# EAGLE board eightbyeight-teardrop (EAGLE 7.7.0), part 1 of 3
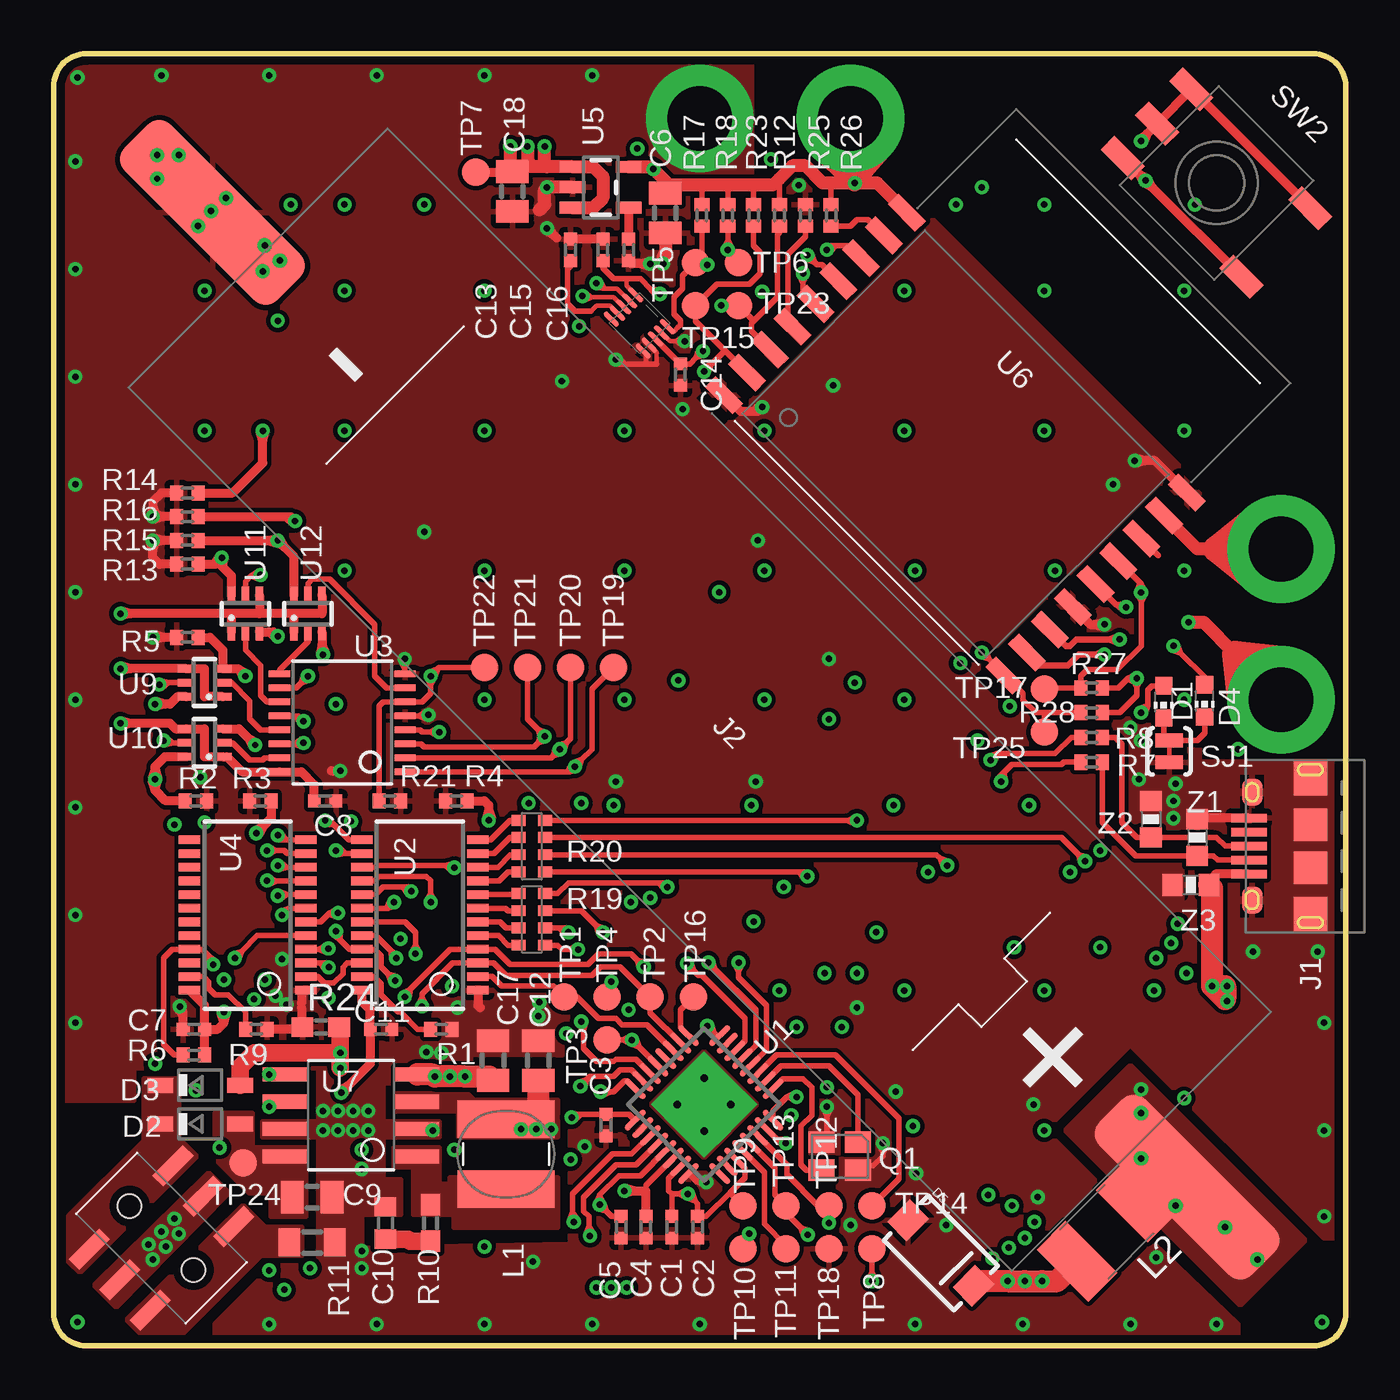
[diagram p0: board, top side]
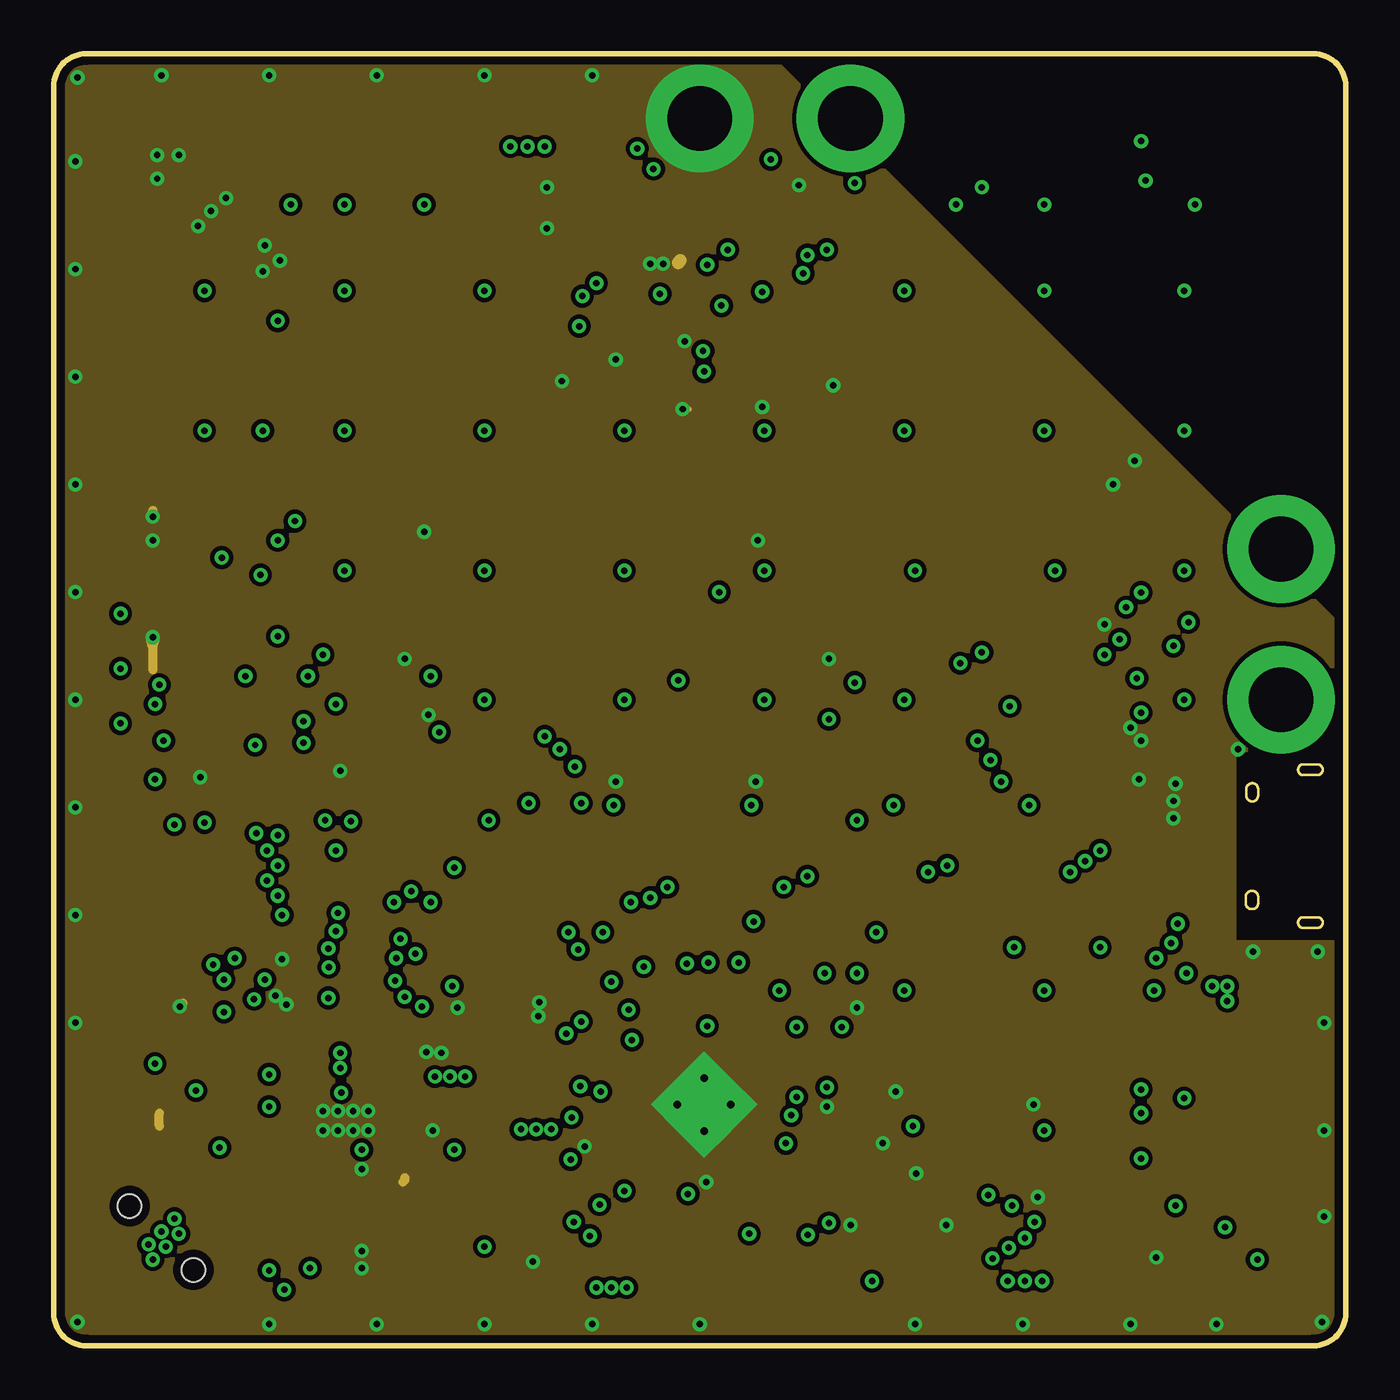
[diagram p1: board, inner layer GND]
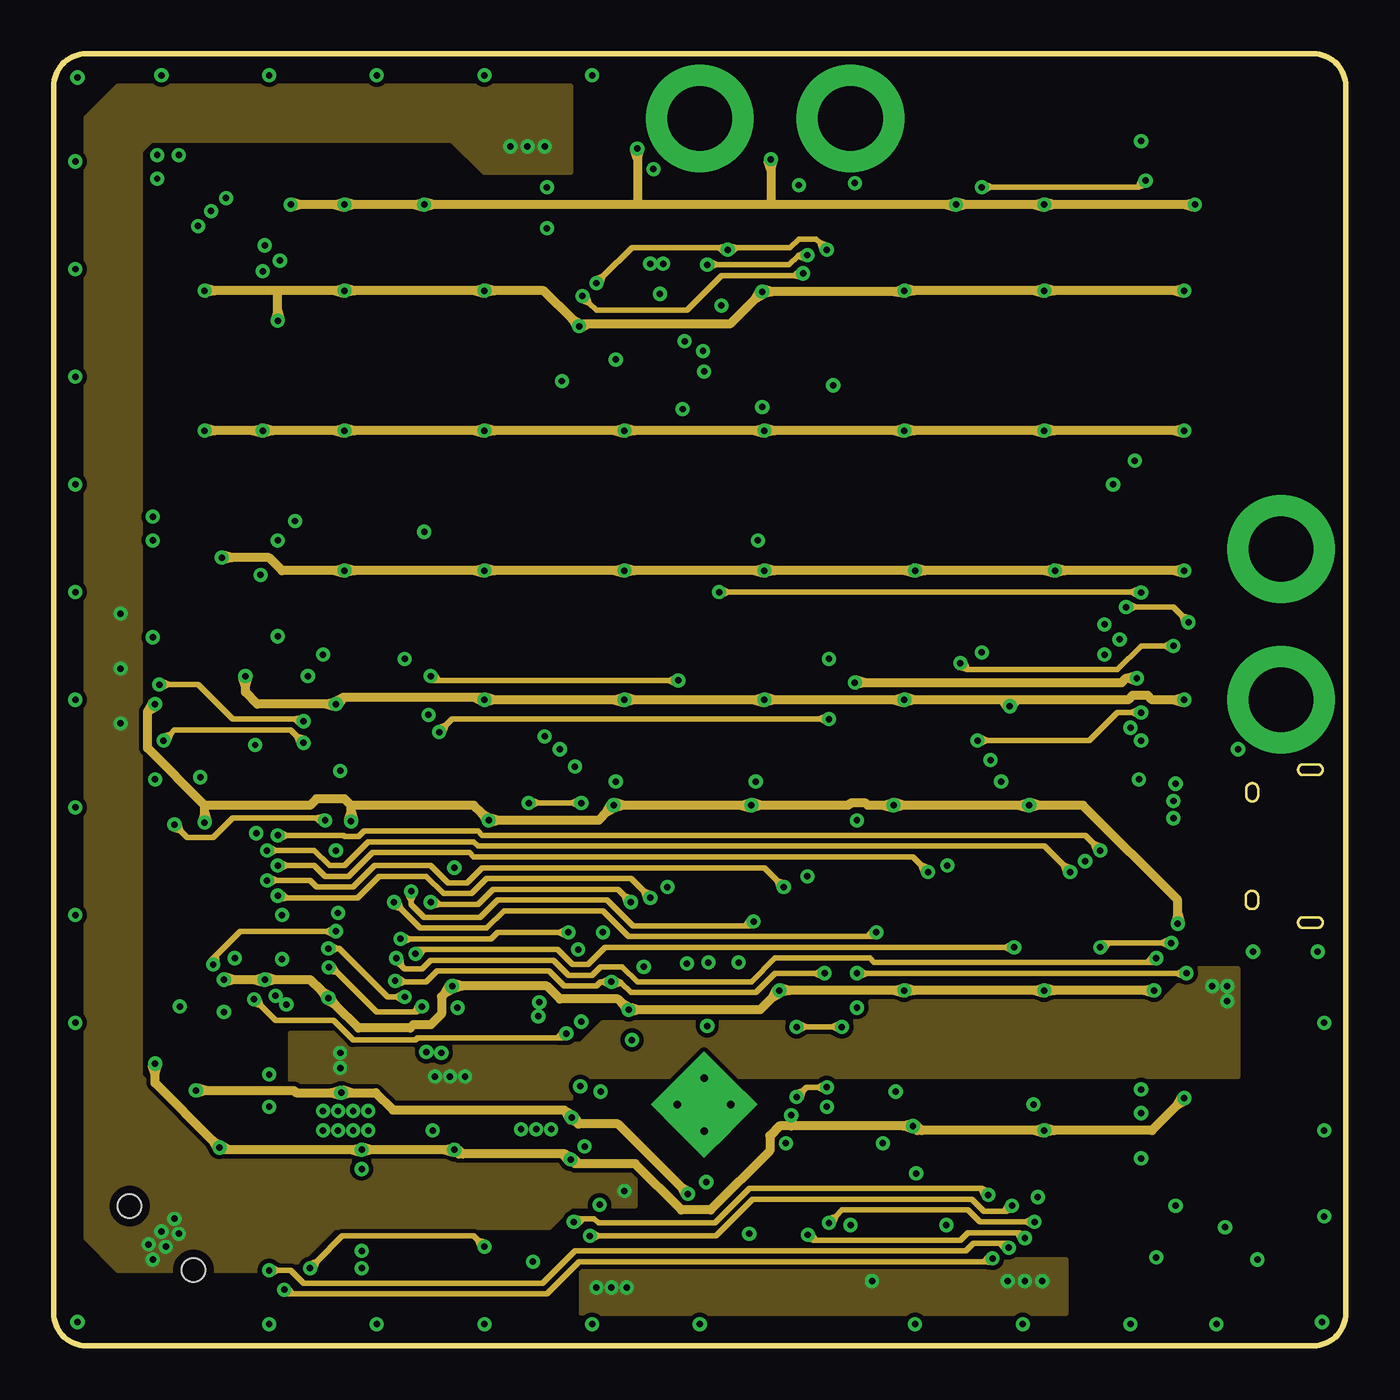
[diagram p2: board, inner layer Route]
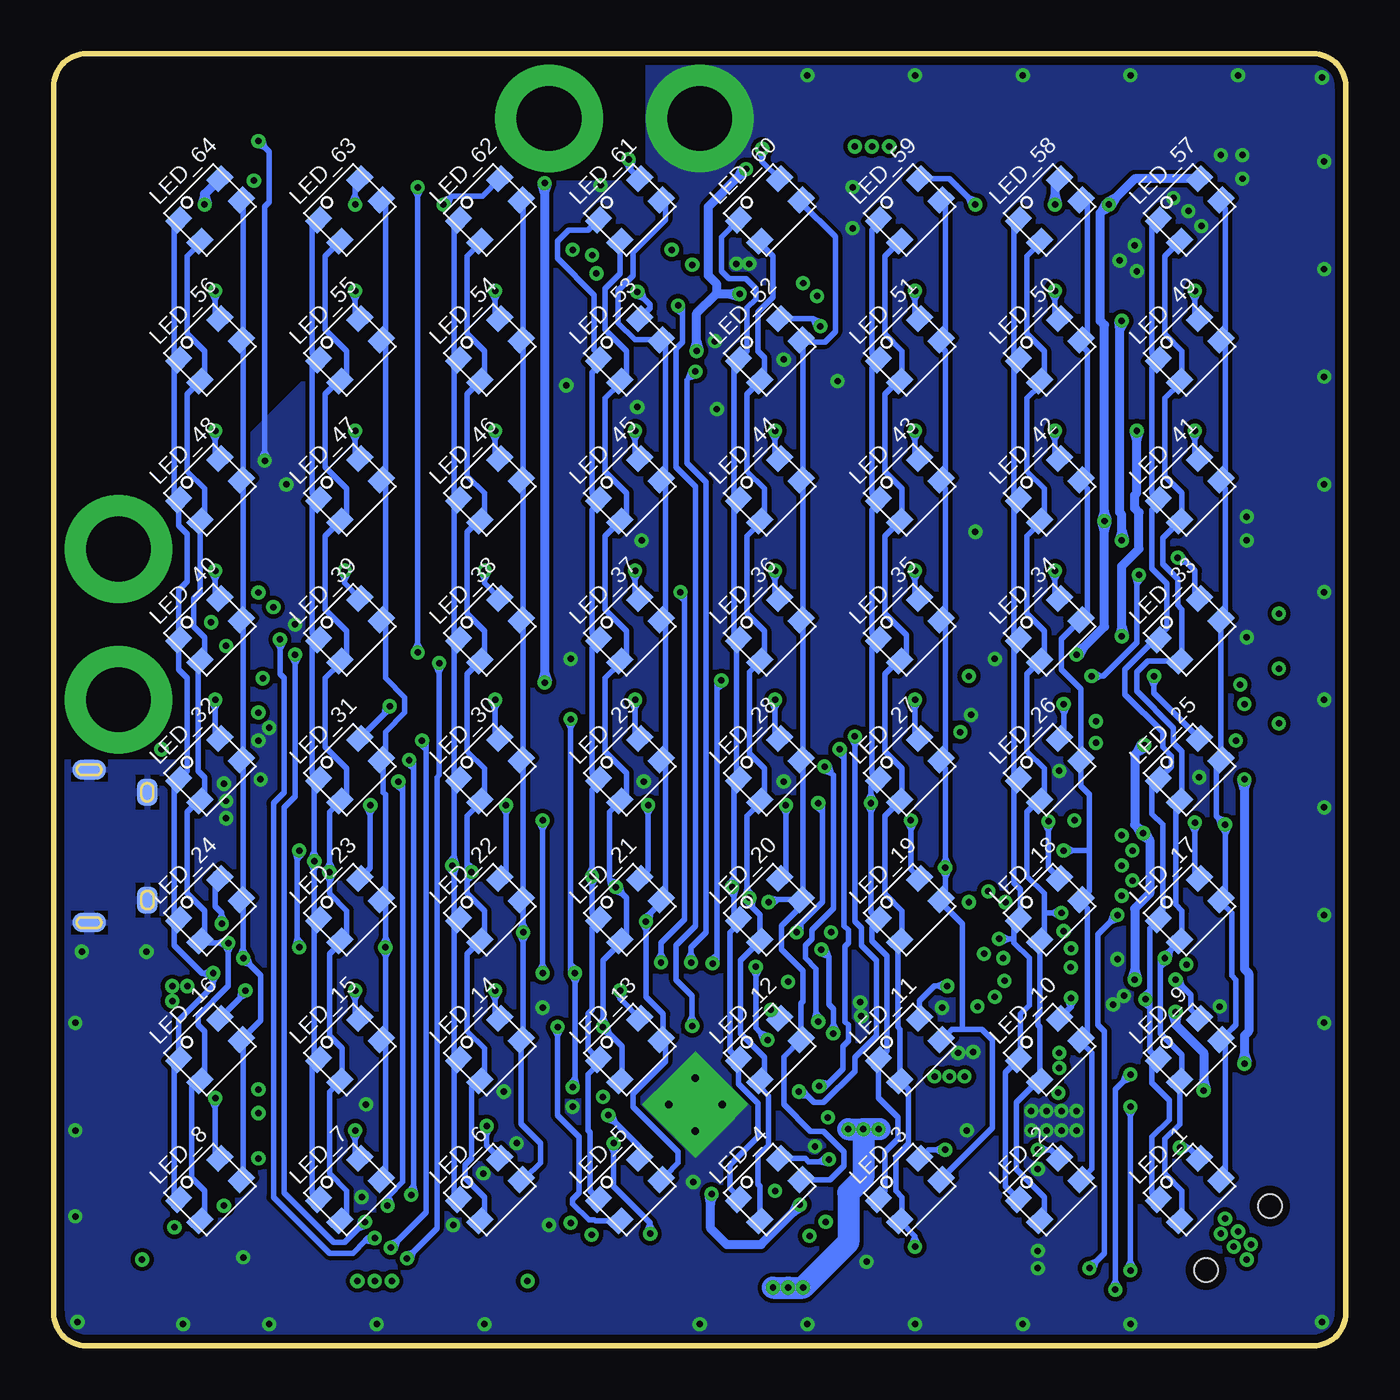
[diagram p3: board, bottom side, seen from below]

Size 60 x 60 mm. Coordinates in mm from the lower left corner, seen from the top.
Outline: 0,58.5 0,1.5 arc90 1.5,0 58.5,0 arc90 60,1.5 60,58.5 arc90 58.5,60 1.5,60 arc90 0,58.5
Copper layers (1*2+15*16): Top 0.0356mm / dielectric 0.6mm / GND 0.0356mm / dielectric 0.2mm / Route 0.0356mm / dielectric 0.6mm / Bottom 0.0356mm
Design rules "BlinkyTape *": minimum track width 0.25mm, minimum drill 0.3mm, track to track 0.2mm, track to pad 0.2mm, pad to pad 0.2mm, via to via 0.2mm, smd to smd 0.2mm, copper to edge 15mil, drill to drill 0.25mm, minimum pad ring 7mil, minimum via ring 7mil, stop-mask expansion 2mil, vias tented up to drill 0.35mm, thermal gap 10mil
Net classes: 1 power: width 0.254 mm, drill 0.35 mm
tRestrict: area 55.1,25.9 to 55.5,26.5; area 55.8,25.9 to 56.2,26.5; area 55.8,24.9 to 56.2,25.5; area 55.1,24.9 to 55.5,25.5; area 55.1,20.9 to 55.5,21.5; area 55.8,20.9 to 56.2,21.5; area 55.8,19.9 to 56.2,20.5; area 55.1,19.9 to 55.5,20.5; area 47.2,3.6 to 50.6,7; area 19.5,13.1 to 23.3,13.4; 13 lines
bRestrict: area 55.8,25.9 to 56.2,26.5; area 55.1,25.9 to 55.5,26.5; area 55.1,24.9 to 55.5,25.5; area 55.8,24.9 to 56.2,25.5; area 55.8,20.9 to 56.2,21.5; area 55.1,20.9 to 55.5,21.5; area 55.1,19.9 to 55.5,20.5; area 55.8,19.9 to 56.2,20.5; area 57.5,19.8 to 58.1,20.2; area 58.6,19.8 to 59.2,20.2; area 58.6,19.1 to 59.2,19.5; area 57.5,19.1 to 58.1,19.5; 4 more areas

## Footprints (pad centres in the part's own frame; a part is rotated, then mirrored left to right if it is on the bottom)
CAP_0402 = smd 0.6 x 0.6: 1 -0.5,0; 2 0.5,0
CAP_0805 = smd 1.05 x 1.5: 1 -0.925,0; 2 0.925,0
CAP_0603 = smd 0.9 x 1: 1 -0.75,0; 2 0.75,0
CHIP-LED0603 = smd 0.8 x 0.8: A 0,-0.75; C 0,0.75
SOD-123 = smd 1.2 x 0.7: A 1.85,0; C -1.85,0
SMA-DIODE = smd 1.27 x 1.47: A -2.15,0; C 2.15,0
USB_MICRO_THRUHOLE = smd 1.645 x 1.55: PAD$1 -3.172,0; PAD$4 3.172,0 | smd 1.5 x 1.55: PAD$2 -1,0; PAD$3 1,0 | smd 1.25 x 0.95: PAD$5 -2.5,2.7; PAD$6 2.5,2.7 | smd 0.9 x 1.55 bottom: PAD$7 -3.55,0; PAD$8 3.55,0 | smd 1.25 x 0.95 bottom: PAD$9 -2.5,2.7; PAD$10 2.5,2.7 | smd 0.4 x 1.65: PIN$1 -1.3,2.85; PIN$2 -0.65,2.85; PIN$3 0,2.85; PIN$4 0.65,2.85; PIN$5 1.3,2.85
BATTERY_AA_SMD = smd 10 x 3: + 32,0; - -32,0
INDUCTOR_CD43 = smd 1.75 x 4.5: P$1 -1.625,0; P$2 1.625,0
L1812 = smd 1.9 x 3.4: 1 -1.95,0; 2 1.95,0
LED_3528 = smd 1 x 0.8: 1 -1.35,0.7; 2 1.35,0.7; 3 1.36,-0.7; 4 -1.35,-0.7
CRSYTAL_2520 = smd 1.2 x 1: P$1 -0.85,-0.65; P$2 0.85,-0.65; P$3 0.85,0.65; P$4 -0.85,0.65
R_0402 = smd 0.6 x 0.7: 1 -0.5,0; 2 0.5,0
R_0603 = smd 1 x 0.9: 1 -0.85,0; 2 0.85,0
R_0805 = smd 1 x 1.3: 1 -1.05,0; 2 1.05,0
0603-ARV = smd 0.5 x 0.65: 1 -1.2,-0.625; 2 -0.4,-0.625; 3 0.4,-0.625; 4 1.2,-0.625; 5 1.2,0.625; 6 0.4,0.625; 7 -0.4,0.625; 8 -1.2,0.625
SJ_2S-TRACE = smd 0.635 x 1.27: 1 -0.508,0; 2 0.508,0
SWITCH_6P-2POS = smd 0.7 x 2: O0 -2,2.75; O1 -2,-2.75; P0 0,2.75; P1 0,-2.75; S0 2,2.75; S1 2,-2.75 | hole 1.1: -2.1,0; 2.1,0
TD-07XB = smd 2 x 0.9: 1 -3.9,-2.25; 2 3.9,-2.25; 3 -3.9,2.25; 4 3.9,2.25; 5 -3.9,0
B1,27 = smd 1.27 x 1.27: TP 0,0
QFN32_5X5_LONGLEADS = smd 1.25 x 0.275: 1 -2.775,1.75; 2 -2.775,1.25; 3 -2.775,0.75; 4 -2.775,0.25; 5 -2.775,-0.25; 6 -2.775,-0.75; 7 -2.775,-1.25; 8 -2.775,-1.75; 17 2.775,-1.75; 18 2.775,-1.25; 19 2.775,-0.75; 20 2.775,-0.25; 21 2.775,0.25; 22 2.775,0.75; 23 2.775,1.25; 24 2.775,1.75 | smd 0.275 x 1.25: 9 -1.75,-2.775; 10 -1.25,-2.775; 11 -0.75,-2.775; 12 -0.25,-2.775; 13 0.25,-2.775; 14 0.75,-2.775; 15 1.25,-2.775; 16 1.75,-2.775; 25 1.75,2.775; 26 1.25,2.775; 27 0.75,2.775; 28 0.25,2.775; 29 -0.25,2.775; 30 -0.75,2.775; 31 -1.25,2.775; 32 -1.75,2.775 | drill 0.35 pad 1.75 square: PAD@1 -0.875,0.875; PAD@4 0.875,0.875; PAD@11 0.875,-0.875 | drill 0.35 pad 1.76 square: PAD@9 -0.875,-0.875
SSOP24-150 = smd 1 x 0.4: 1 -2.7,3.493; 2 -2.7,2.857; 3 -2.7,2.223; 4 -2.7,1.587; 5 -2.7,0.953; 6 -2.7,0.318; 7 -2.7,-0.318; 8 -2.7,-0.953; 9 -2.7,-1.587; 10 -2.7,-2.223; 11 -2.7,-2.857; 12 -2.7,-3.493; 13 2.7,-3.493; 14 2.7,-2.857; 15 2.7,-2.223; 16 2.7,-1.587; 17 2.7,-0.953; 18 2.7,-0.318; 19 2.7,0.318; 20 2.7,0.953; 21 2.7,1.587; 22 2.7,2.223; 23 2.7,2.857; 24 2.7,3.493
TSSOP16 = smd 0.305 x 0.991: 1 -1.95,-2.918; 2 -1.3,-2.918; 3 -0.65,-2.918; 4 0,-2.918; 5 0.65,-2.918; 6 1.3,-2.918; 7 1.95,-2.918; 8 2.6,-2.918; 9 2.6,2.918; 10 1.95,2.918; 11 1.3,2.918; 12 0.65,2.918; 13 0,2.918; 14 -0.65,2.918; 15 -1.3,2.918; 16 -1.95,2.918
SOT23-5 = smd 0.55 x 1.2: 1 -0.95,-1.3; 2 0,-1.3; 3 0.95,-1.3; 4 0.95,1.3; 5 -0.95,1.3
ESP_WROOM_02 = smd 1.8 x 0.7: 3V3 -9.2,3; EN -9.2,1.5; GND$1 -9.2,-9; GND$2 9.2,3; GND$3 9.2,-4.5; IO0 -9.2,-7.5; IO2 -9.2,-6; IO4 9.2,-9; IO5 9.2,-3; IO12 -9.2,-1.5; IO13 -9.2,-3; IO14 -9.2,0; IO15 -9.2,-4.5; IO18 9.2,1.5; RST 9.2,-1.5; RXD 9.2,-7.5; TOUT 9.2,0; TXD 9.2,-6
SO08-150 = smd 0.66 x 2.032: 1 -1.905,-3.073; 2 -0.635,-3.073; 3 0.635,-3.073; 4 1.905,-3.073; 5 1.905,3.073; 6 0.635,3.073; 7 -0.635,3.073; 8 -1.905,3.073
VFDFN-10 = smd 0.9 x 0.225: P$1 -1.05,0.8; P$2 -1.05,0.4; P$3 -1.05,0; P$4 -1.05,-0.4; P$5 -1.05,-0.8; P$6 1.05,-0.8; P$7 1.05,-0.4; P$8 1.05,0; P$9 1.05,0.4; P$10 1.05,0.8
SC70-6L = smd 0.35 x 0.8: 1 -0.65,-0.85; 2 0,-0.85; 3 0.65,-0.85; 4 0.65,0.85; 5 0,0.85; 6 -0.65,0.85
IO_HOLE_3MM = drill 3 pad 5: 1 0,0
SPARKFUN-RESISTORS_0603-RES = smd 0.94 x 1.016: 1 -0.85,0; 2 0.85,0

## Placement (x,y rotation side)
C1  100nF  [CAP_0402]  28.7,5.5 270 top
C2  100nF  [CAP_0402]  29.9,5.5 270 top
C3  100nF  [CAP_0402]  25.65,10.25 270 top
C4  100nF  [CAP_0402]  27.5,5.5 270 top
C5  2.2uF  [CAP_0402]  26.35,5.5 270 top
C6  10uF  [CAP_0805]  28.4,52.6 270 top
C7  100nF  [CAP_0402]  6.5,14.7 180 top
C8  100nF  [CAP_0402]  12.6,25.3 0 top
C9  10uF  [CAP_0805]  12,6.9 0 top
C10  2.2nF  [CAP_0603]  15.4,5.7 90 top
C11  100nF  [CAP_0402]  15.2,14.7 0 top
C12  10uF  [CAP_0805]  22.5,13.25 90 top
C13  100nF  [CAP_0402]  24,50.9 90 top
C14  100nF  [CAP_0402]  29.1,45.1 270 top
C15  100nF  [CAP_0402]  25.5,50.9 90 top
C16  47pF  [CAP_0402]  26.7,50.9 270 top
C17  10uF  [CAP_0805]  20.4,13.25 90 top
C18  10uF  [CAP_0805]  21.3,53.6 270 top
D1  ORANGE  [CHIP-LED0603]  51.55,29.9 180 top
D2  1N5819  [SOD-123]  6.8,10.3 0 top
D3  1N5819  [SOD-123]  6.8,12.1 0 top
D4  PURPLE  [CHIP-LED0603]  53.45,29.95 180 top
D5  1N5822  [SMA-DIODE]  41.2,4.3 315 top
J1  USB_MICROSMT+THRUHULE  [USB_MICRO_THRUHOLE]  58.36,23.2 90 top
J2  BATTERYAA_SMD  [BATTERY_AA_SMD]  30,30 315 top
L1  2.2uH  [INDUCTOR_CD43]  21,8.9 270 top
L2  1812L260THDR  [L1812]  48.9,5.3 225 top
LED_1  LED_RGB_CA3528  [LED_3528]  7.25,7.25 45 bottom
LED_2  LED_RGB_CA3528  [LED_3528]  13.75,7.25 45 bottom
LED_3  LED_RGB_CA3528  [LED_3528]  20.25,7.25 45 bottom
LED_4  LED_RGB_CA3528  [LED_3528]  26.75,7.25 45 bottom
LED_5  LED_RGB_CA3528  [LED_3528]  33.25,7.25 45 bottom
LED_6  LED_RGB_CA3528  [LED_3528]  39.75,7.25 45 bottom
LED_7  LED_RGB_CA3528  [LED_3528]  46.25,7.25 45 bottom
LED_8  LED_RGB_CA3528  [LED_3528]  52.75,7.25 45 bottom
LED_9  LED_RGB_CA3528  [LED_3528]  7.25,13.75 45 bottom
LED_10  LED_RGB_CA3528  [LED_3528]  13.75,13.75 45 bottom
LED_11  LED_RGB_CA3528  [LED_3528]  20.25,13.75 45 bottom
LED_12  LED_RGB_CA3528  [LED_3528]  26.75,13.75 45 bottom
LED_13  LED_RGB_CA3528  [LED_3528]  33.25,13.75 45 bottom
LED_14  LED_RGB_CA3528  [LED_3528]  39.75,13.75 45 bottom
LED_15  LED_RGB_CA3528  [LED_3528]  46.25,13.75 45 bottom
LED_16  LED_RGB_CA3528  [LED_3528]  52.75,13.75 45 bottom
LED_17  LED_RGB_CA3528  [LED_3528]  7.25,20.25 45 bottom
LED_18  LED_RGB_CA3528  [LED_3528]  13.75,20.25 45 bottom
LED_19  LED_RGB_CA3528  [LED_3528]  20.25,20.25 45 bottom
LED_20  LED_RGB_CA3528  [LED_3528]  26.75,20.25 45 bottom
LED_21  LED_RGB_CA3528  [LED_3528]  33.25,20.25 45 bottom
LED_22  LED_RGB_CA3528  [LED_3528]  39.75,20.25 45 bottom
LED_23  LED_RGB_CA3528  [LED_3528]  46.25,20.25 45 bottom
LED_24  LED_RGB_CA3528  [LED_3528]  52.75,20.25 45 bottom
LED_25  LED_RGB_CA3528  [LED_3528]  7.25,26.75 45 bottom
LED_26  LED_RGB_CA3528  [LED_3528]  13.75,26.75 45 bottom
LED_27  LED_RGB_CA3528  [LED_3528]  20.25,26.75 45 bottom
LED_28  LED_RGB_CA3528  [LED_3528]  26.75,26.75 45 bottom
LED_29  LED_RGB_CA3528  [LED_3528]  33.25,26.75 45 bottom
LED_30  LED_RGB_CA3528  [LED_3528]  39.75,26.75 45 bottom
LED_31  LED_RGB_CA3528  [LED_3528]  46.25,26.75 45 bottom
LED_32  LED_RGB_CA3528  [LED_3528]  52.75,26.75 45 bottom
LED_33  LED_RGB_CA3528  [LED_3528]  7.25,33.25 45 bottom
LED_34  LED_RGB_CA3528  [LED_3528]  13.75,33.25 45 bottom
LED_35  LED_RGB_CA3528  [LED_3528]  20.25,33.25 45 bottom
LED_36  LED_RGB_CA3528  [LED_3528]  26.75,33.25 45 bottom
LED_37  LED_RGB_CA3528  [LED_3528]  33.25,33.25 45 bottom
LED_38  LED_RGB_CA3528  [LED_3528]  39.75,33.25 45 bottom
LED_39  LED_RGB_CA3528  [LED_3528]  46.25,33.25 45 bottom
LED_40  LED_RGB_CA3528  [LED_3528]  52.75,33.25 45 bottom
LED_41  LED_RGB_CA3528  [LED_3528]  7.25,39.75 45 bottom
LED_42  LED_RGB_CA3528  [LED_3528]  13.75,39.75 45 bottom
LED_43  LED_RGB_CA3528  [LED_3528]  20.25,39.75 45 bottom
LED_44  LED_RGB_CA3528  [LED_3528]  26.75,39.75 45 bottom
LED_45  LED_RGB_CA3528  [LED_3528]  33.25,39.75 45 bottom
LED_46  LED_RGB_CA3528  [LED_3528]  39.75,39.75 45 bottom
LED_47  LED_RGB_CA3528  [LED_3528]  46.25,39.75 45 bottom
LED_48  LED_RGB_CA3528  [LED_3528]  52.75,39.75 45 bottom
LED_49  LED_RGB_CA3528  [LED_3528]  7.25,46.25 45 bottom
LED_50  LED_RGB_CA3528  [LED_3528]  13.75,46.25 45 bottom
LED_51  LED_RGB_CA3528  [LED_3528]  20.25,46.25 45 bottom
LED_52  LED_RGB_CA3528  [LED_3528]  26.75,46.25 45 bottom
LED_53  LED_RGB_CA3528  [LED_3528]  33.25,46.25 45 bottom
LED_54  LED_RGB_CA3528  [LED_3528]  39.75,46.25 45 bottom
LED_55  LED_RGB_CA3528  [LED_3528]  46.25,46.25 45 bottom
LED_56  LED_RGB_CA3528  [LED_3528]  52.75,46.25 45 bottom
LED_57  LED_RGB_CA3528  [LED_3528]  7.25,52.75 45 bottom
LED_58  LED_RGB_CA3528  [LED_3528]  13.75,52.75 45 bottom
LED_59  LED_RGB_CA3528  [LED_3528]  20.25,52.75 45 bottom
LED_60  LED_RGB_CA3528  [LED_3528]  26.75,52.75 45 bottom
LED_61  LED_RGB_CA3528  [LED_3528]  33.25,52.75 45 bottom
LED_62  LED_RGB_CA3528  [LED_3528]  39.75,52.75 45 bottom
LED_63  LED_RGB_CA3528  [LED_3528]  46.25,52.75 45 bottom
LED_64  LED_RGB_CA3528  [LED_3528]  52.75,52.75 45 bottom
Q1  16MHz  [CRSYTAL_2520]  36.5,8.8 180 top
R1  1k 1%  [R_0402]  18,14.7 180 top
R2  4.7k  [R_0402]  6.6,25.3 180 top
R3  4.7k  [R_0402]  9.6,25.3 0 top
R4  4.7k  [R_0402]  18.7,25.3 0 top
R5  4.7k  [R_0402]  6.2,32.9 0 top
R6  10k  [R_0402]  6.5,13.5 0 top
R7  33  [R_0402]  48.2,27.1 180 top
R8  33  [R_0402]  48.2,28.25 180 top
R9  1k 1%  [R_0402]  9.4,14.7 180 top
R10  1  [R_0603]  17.5,5.7 270 top
R11  47  [R_0805]  12,4.8 180 top
R12  10k  [R_0402]  33.7,52.5 90 top
R13  4.7k  [R_0402]  6.2,36.3 0 top
R14  4.7k  [R_0402]  6.2,39.6 0 top
R15  4.7k  [R_0402]  6.2,37.4 0 top
R16  4.7k  [R_0402]  6.2,38.5 0 top
R17  4.7k  [R_0402]  30.1,52.5 90 top
R18  4.7k  [R_0402]  31.3,52.5 90 top
R19  200  [0603-ARV]  22.2,19.8 270 top
R20  200  [0603-ARV]  22.2,23.2 270 top
R21  10k  [R_0402]  15.6,25.3 180 top
R23  10k  [R_0402]  32.5,52.5 90 top
R24  510  [R_0603]  12.4,14.8 0 top
R25  10k  [R_0402]  34.9,52.5 270 top
R26  10k  [R_0402]  36.1,52.5 90 top
R27  10k  [R_0402]  48.2,30.55 0 top
R28  10k  [R_0402]  48.2,29.4 0 top
SJ1  SOLDERJUMPERTRACE  [SJ_2S-TRACE]  51.8,27.6 90 top
SW1  SWITCH_SPDT  [SWITCH_6P-2POS]  5,5 135 top
SW2  BRIGHTNESS  [TD-07XB]  54,54 315 top
TP1  PTR1B1,27  [B1,27]  23.7,16.2 0 top
TP2  PTR1B1,27  [B1,27]  27.7,16.2 0 top
TP3  PTR1B1,27  [B1,27]  25.7,14.2 0 top
TP4  PTR1B1,27  [B1,27]  25.7,16.2 0 top
TP5  PTR1B1,27  [B1,27]  29.8,50.3 0 top
TP6  PTR1B1,27  [B1,27]  31.8,50.3 0 top
TP7  PTR1B1,27  [B1,27]  19.6,54.5 0 top
TP8  PTR1B1,27  [B1,27]  38,4.5 0 top
TP9  PTR1B1,27  [B1,27]  32,6.5 0 top
TP10  PTR1B1,27  [B1,27]  32,4.5 0 top
TP11  PTR1B1,27  [B1,27]  34,4.5 0 top
TP12  PTR1B1,27  [B1,27]  36,6.5 0 top
TP13  PTR1B1,27  [B1,27]  34,6.5 0 top
TP14  PTR1B1,27  [B1,27]  38,6.5 0 top
TP15  PTR1B1,27  [B1,27]  29.8,48.3 0 top
TP16  PTR1B1,27  [B1,27]  29.7,16.2 0 top
TP17  PTR1B1,27  [B1,27]  46,30.5 0 top
TP18  PTR1B1,27  [B1,27]  36,4.5 0 top
TP19  PTR1B1,27  [B1,27]  26,31.5 0 top
TP20  PTR1B1,27  [B1,27]  24,31.5 0 top
TP21  PTR1B1,27  [B1,27]  22,31.5 0 top
TP22  PTR1B1,27  [B1,27]  20,31.5 0 top
TP23  PTR1B1,27  [B1,27]  31.8,48.3 0 top
TP24  PTR1B1,27  [B1,27]  8.8,8.5 0 top
TP25  PTR1B1,27  [B1,27]  46,28.5 0 top
U1  MK20DN64VFM5  [QFN32_5X5_LONGLEADS]  30.2,11.2 45 top
U2  ICN2026  [SSOP24-150]  17,20 180 top
U3  74138  [TSSOP16]  13.4,28.6 90 top
U4  ICN2026  [SSOP24-150]  9,20 180 top
U5  MIC5219 3.3V  [SOT23-5]  25.4,53.8 270 top
U6  ESP_WROOM_02  [ESP_WROOM_02]  44,44 315 top
U7  MP3401A  [SO08-150]  13.8,10.7 90 top
U8  MMA8653FC  [VFDFN-10]  27.2,47.5 315 top
U9  FDG6316P  [SC70-6L]  7,30.8 90 top
U10  FDG6316P  [SC70-6L]  7,28 90 top
U11  FDG6316P  [SC70-6L]  8.9,34 0 top
U12  FDG6316P  [SC70-6L]  11.8,34 0 top
U$2  TEST_POINT  [IO_HOLE_3MM]  30,57 0 top
U$6  TEST_POINT  [IO_HOLE_3MM]  57,30 0 top
U$9  TEST_POINT  [IO_HOLE_3MM]  57,37 0 top
U$10  TEST_POINT  [IO_HOLE_3MM]  37,57 0 top
Z1  PGB1010603  [SPARKFUN-RESISTORS_0603-RES]  53.1,23.6 270 top
Z2  PGB1010603  [SPARKFUN-RESISTORS_0603-RES]  50.95,24.45 270 top
Z3  PGB1010603  [SPARKFUN-RESISTORS_0603-RES]  52.8,21.4 0 top

## Library data of the parts
C1-C18 D2 D3 J1 J2 L1 LED_1-LED_64 Q1 R1-R18 R21 R23-R28 SW1 SW2 U1-U4 U6 U7 = blinkinlabs
D1 D4 = adafruit
D5 = SparkFun-DiscreteSemi
L2 = rcl
R19 R20 SJ1 = SparkFun-Passives
TP1-TP25 = testpad
U5 = SparkFun-PowerIC; PROD_ID: VREG-09872
U8-U12 = teensy_adapter
U$2 U$6 U$9 U$10 = DevicesToMerge
Z1-Z3 = PaxInstrument-T400; MF: Littelfuse; MPN: PGB1010603NRHF

## Nets
1ROW0: LED_1.2 LED_2.2 LED_3.2 LED_4.2 LED_5.2 LED_6.2 LED_7.2 LED_8.2 R2.2 U10.6
1ROW1: LED_9.2 LED_10.2 LED_11.2 LED_12.2 LED_13.2 LED_14.2 LED_15.2 LED_16.2 R3.2 U10.3
1ROW2: LED_17.2 LED_18.2 LED_19.2 LED_20.2 LED_21.2 LED_22.2 LED_23.2 LED_24.2 R4.2 U9.6
1ROW3: LED_25.2 LED_26.2 LED_27.2 LED_28.2 LED_29.2 LED_30.2 LED_31.2 LED_32.2 R5.2 U9.3
1ROW4: LED_33.2 LED_34.2 LED_35.2 LED_36.2 LED_37.2 LED_38.2 LED_39.2 LED_40.2 R13.2 U11.6
1ROW5: LED_41.2 LED_42.2 LED_43.2 LED_44.2 LED_45.2 LED_46.2 LED_47.2 LED_48.2 R14.2 U11.3
1ROW6: LED_49.2 LED_50.2 LED_51.2 LED_52.2 LED_53.2 LED_54.2 LED_55.2 LED_56.2 R15.2 U12.6
1ROW7: LED_57.2 LED_58.2 LED_59.2 LED_60.2 LED_61.2 LED_62.2 LED_63.2 LED_64.2 R16.2 U12.3
+3V3: C6.1 C14.1 C15.1 R12.2 R17.2 R18.2 R23.2 R26.2 R27.2 R28.2 U5.5 U6.3V3 U8.P$1 U8.P$8 U$10.1
+5V: C4.1 C8.1 C18.1 SW1.P0 SW1.P1 TP7.TP U1.6 U3.16 U5.1 U5.3 U9.1 U9.4 U10.1 U10.4 U11.1 U11.4 U12.1 U12.4
+5V_BLEED: R11.2 SW1.O0 SW1.O1
+5V_SWITCH: D2.C D3.C SW1.S0 SW1.S1
ACC_INT1: U6.IO13 U8.P$3
ARM_3V3: C1.1 C2.1 C3.1 C5.1 C7.1 C11.1 R6.2 TP9.TP U1.1 U1.5 U1.7 U1.11 U2.24 U4.24
ARM_BOOTLOADER: TP16.TP U1.25
ARM_RESET: TP14.TP U1.19
ARM_RX: TP13.TP U1.13 U6.TXD
ARM_RX1: R12.1 TP23.TP U1.24 U6.IO2
ARM_TCK: TP11.TP U1.12
ARM_TMS: TP10.TP U1.15
ARM_TX: TP12.TP U1.14 U6.RXD
BCOL0: LED_1.3 LED_9.3 LED_17.3 LED_25.3 LED_33.3 LED_41.3 LED_49.3 LED_57.3 U2.13
BCOL1: LED_2.3 LED_10.3 LED_18.3 LED_26.3 LED_34.3 LED_42.3 LED_50.3 LED_58.3 U2.14
BCOL2: LED_3.3 LED_11.3 LED_19.3 LED_27.3 LED_35.3 LED_43.3 LED_51.3 LED_59.3 U2.15
BCOL3: LED_4.3 LED_12.3 LED_20.3 LED_28.3 LED_36.3 LED_44.3 LED_52.3 LED_60.3 U2.16
BCOL4: LED_5.3 LED_13.3 LED_21.3 LED_29.3 LED_37.3 LED_45.3 LED_53.3 LED_61.3 U2.17
BCOL5: LED_6.3 LED_14.3 LED_22.3 LED_30.3 LED_38.3 LED_46.3 LED_54.3 LED_62.3 U2.18
BCOL6: LED_7.3 LED_15.3 LED_23.3 LED_31.3 LED_39.3 LED_47.3 LED_55.3 LED_63.3 U2.19
BCOL7: LED_8.3 LED_16.3 LED_24.3 LED_32.3 LED_40.3 LED_48.3 LED_56.3 LED_64.3 U2.20
BOOST_5V: C9.1 D2.A TP24.TP U7.8
BUTTON: R28.1 SW2.1 SW2.2 TP25.TP U6.IO4
CHARGE: D1.A U7.6
DISCHARGE: D4.A U7.5
ESP_ENABLE: R26.1 U6.EN
ESP_GPIO0: R23.1 TP15.TP U1.21 U6.IO0
ESP_GPIO15: R25.2 U6.IO15
ESP_GPIO16: U6.IO18 U$9.1
ESP_RESET: R27.1 TP17.TP U1.20 U6.RST
ESP_TOUT: U6.TOUT
EXP_GPIO5: U6.IO5 U$6.1
GCOL0: LED_1.4 LED_9.4 LED_17.4 LED_25.4 LED_33.4 LED_41.4 LED_49.4 LED_57.4 U4.5
GCOL1: LED_2.4 LED_10.4 LED_18.4 LED_26.4 LED_34.4 LED_42.4 LED_50.4 LED_58.4 U4.6
GCOL2: LED_3.4 LED_11.4 LED_19.4 LED_27.4 LED_35.4 LED_43.4 LED_51.4 LED_59.4 U4.7
GCOL3: LED_4.4 LED_12.4 LED_20.4 LED_28.4 LED_36.4 LED_44.4 LED_52.4 LED_60.4 U4.8
GCOL4: LED_5.4 LED_13.4 LED_21.4 LED_29.4 LED_37.4 LED_45.4 LED_53.4 LED_61.4 U4.9
GCOL5: LED_6.4 LED_14.4 LED_22.4 LED_30.4 LED_38.4 LED_46.4 LED_54.4 LED_62.4 U4.10
GCOL6: LED_7.4 LED_15.4 LED_23.4 LED_31.4 LED_39.4 LED_47.4 LED_55.4 LED_63.4 U4.11
GCOL7: LED_8.4 LED_16.4 LED_24.4 LED_32.4 LED_40.4 LED_48.4 LED_56.4 LED_64.4 U4.12
GND: C1.2 C2.2 C3.2 C4.2 C5.2 C6.2 C7.2 C8.2 C9.2 C10.2 C11.2 C12.2 C13.2 C14.2 C15.2 C16.2 C17.2 C18.2 D5.A J1.PAD$1 J1.PAD$2 J1.PAD$3 J1.PAD$4 J1.PAD$5 J1.PAD$6 J1.PAD$7 J1.PAD$8 J1.PAD$9 J1.PAD$10 J1.PIN$5 J2.- Q1.P$2 Q1.P$4 R1.1 R2.1 R3.1 R4.1 R5.1 R9.1 R11.1 R13.1 R14.1 R15.1 R16.1 R21.1 R24.1 R25.1 SJ1.1 SW2.3 SW2.4 SW2.5 TP18.TP U1.2 U1.8 U1.PAD@1 U1.PAD@4 U1.PAD@9 U1.PAD@11 U2.1 U3.5 U3.8 U4.1 U5.2 U6.GND$1 U6.GND$2 U6.GND$3 U7.2 U7.7 U8.P$6 U8.P$7 U8.P$9 U$2.1 Z1.1 Z2.1 Z3.1
I2C_SCL: R18.1 TP6.TP U6.IO14 U8.P$2
I2C_SDA: R17.1 TP5.TP U6.IO12 U8.P$10
LED_CLK: TP2.TP U1.26 U2.3 U4.3
LED_DAT_0: TP1.TP U1.27 U2.2
LED_DAT_1: U2.22 U4.2
LED_HS_EN: R21.2 TP22.TP U1.22 U3.6
LED_OE: R6.1 TP4.TP U1.16 U2.21 U3.4 U4.21
LED_ROW_A: TP19.TP U1.30 U3.1
LED_ROW_B: TP20.TP U1.31 U3.2
LED_ROW_C: TP21.TP U1.32 U3.3
LED_S0: U3.15 U10.2
LED_S1: U3.14 U10.5
LED_S2: U3.13 U9.2
LED_S3: U3.12 U9.5
LED_S4: U3.11 U11.2
LED_S5: U3.10 U11.5
LED_S6: U3.9 U12.2
LED_S7: U3.7 U12.5
LED_STB: TP3.TP U1.29 U2.4 U4.4
N$1: D1.C D4.C SJ1.2
N$2: R9.2 U4.23
N$3: L1.P$2 R10.1 U7.1
N$5: C13.1 U8.P$4
N$6: Q1.P$3 U1.17
N$7: C10.1 R10.2
N$9: J1.PIN$2 R7.1 Z1.2
N$10: J1.PIN$3 R8.1 Z2.2
N$15: C16.1 U5.4
N$18: R1.2 U2.23
N$61: Q1.P$1 U1.18
RCOL0: LED_1.1 LED_9.1 LED_17.1 LED_25.1 LED_33.1 LED_41.1 LED_49.1 LED_57.1 R19.5
RCOL0_: R19.4 U2.5
RCOL1: LED_2.1 LED_10.1 LED_18.1 LED_26.1 LED_34.1 LED_42.1 LED_50.1 LED_58.1 R19.6
RCOL1_: R19.3 U2.6
RCOL2: LED_3.1 LED_11.1 LED_19.1 LED_27.1 LED_35.1 LED_43.1 LED_51.1 LED_59.1 R19.7
RCOL2_: R19.2 U2.7
RCOL3: LED_4.1 LED_12.1 LED_20.1 LED_28.1 LED_36.1 LED_44.1 LED_52.1 LED_60.1 R19.8
RCOL3_: R19.1 U2.8
RCOL4: LED_5.1 LED_13.1 LED_21.1 LED_29.1 LED_37.1 LED_45.1 LED_53.1 LED_61.1 R20.5
RCOL4_: R20.4 U2.9
RCOL5: LED_6.1 LED_14.1 LED_22.1 LED_30.1 LED_38.1 LED_46.1 LED_54.1 LED_62.1 R20.6
RCOL5_: R20.3 U2.10
RCOL6: LED_7.1 LED_15.1 LED_23.1 LED_31.1 LED_39.1 LED_47.1 LED_55.1 LED_63.1 R20.7
RCOL6_: R20.2 U2.11
RCOL7: LED_8.1 LED_16.1 LED_24.1 LED_32.1 LED_40.1 LED_48.1 LED_56.1 LED_64.1 R20.8
RCOL7_: R20.1 U2.12
USB_5V: C17.1 D3.A J1.PIN$1 R24.2 U7.4 Z3.2
USB_D+: R8.2 U1.3
USB_D-: R7.2 U1.4
VBAT: J2.+ L2.1
VBAT_FUSED: C12.1 D5.C L1.P$1 L2.2 TP8.TP U7.3

## Tracks (layer width: path | path; a pad name or v marks a point on that pad's centre or on a via)
1ROW0  (via drill 0.3)
  Top 0.406: U10.6 5.15,27.35 4.7,26.9 4.7,26.75 | 4.7,26.75 v4.7,26.3 | R2.2 5.2,25.3 4.7,25.8 4.7,25.85 | 4.7,25.85 v4.7,26.3 | 4.7,26.75 4.58,26.34 v4.7,26.3 | 4.7,26.75 4.82,26.34 v4.7,26.3 | 4.7,25.85 4.82,26.27 v4.7,26.3 | 4.7,25.85 4.58,26.27 v4.7,26.3
  Route 0.254: v34.25,10.7 34.25,10.25 | 34.25,10.25 34.25,10.2 | 34.25,10.25 34.43,10.61 v34.25,10.7 | 34.25,10.25 34.07,10.61 v34.25,10.7
  Route 0.406: v52.5,11.5 52.18,11.18 | 52.18,11.18 51,10 46.45,10 | 46.45,10 v46,10 | v46,10 45.55,10 | 45.55,10 40.3,10 | 40.3,10 40.1,10 v39.9,10.2 | v39.9,10.2 39.45,10.2 | 39.45,10.2 34.25,10.2 33.7,10.2 33.25,9.75 33.25,9.05 30.5,6.3 29.15,6.3 27,8.45 24.4,8.45 | v24,8.65 23.75,8.9 23.63,8.9 | 23.63,8.9 19,8.9 | 19,8.9 18.8,8.9 v18.6,9.1 | v18.6,9.1 18.15,9.1 | 18.15,9.1 14.75,9.1 | 14.75,9.1 v14.3,9.1 | v14.3,9.1 13.85,9.1 | 13.85,9.1 8.14,9.1 | 8.14,9.1 7.8,9.1 v7.7,9.2 | 24.4,8.45 24.2,8.45 v24,8.65 | v7.7,9.2 7.38,9.52 | 7.38,9.52 4.7,12.2 4.7,12.65 | 4.7,12.65 v4.7,13.1 | 52.18,11.18 52.56,11.39 v52.5,11.5 | 52.18,11.18 52.39,11.56 v52.5,11.5 | 46.45,10 46.03,10.12 v46,10 | 46.45,10 46.03,9.88 v46,10 | 45.55,10 45.97,9.88 v46,10 | 45.55,10 45.97,10.12 v46,10 | 40.3,10 39.98,10.29 v39.9,10.2 | 40.3,10 39.88,10.08 v39.9,10.2 | 39.45,10.2 39.87,10.08 v39.9,10.2 | 39.45,10.2 39.87,10.32 v39.9,10.2 | 23.63,8.9 23.91,8.57 v24,8.65 | 23.63,8.9 24.04,8.77 v24,8.65 | 24.4,8.45 24.08,8.74 v24,8.65 | 24.4,8.45 23.98,8.53 v24,8.65 | 19,8.9 18.68,9.19 v18.6,9.1 | 19,8.9 18.58,8.98 v18.6,9.1 | 18.15,9.1 18.57,8.98 v18.6,9.1 | 18.15,9.1 18.57,9.22 v18.6,9.1 | 14.75,9.1 14.34,9.22 v14.3,9.1 | 14.75,9.1 14.34,8.98 v14.3,9.1 | 13.85,9.1 14.27,8.98 v14.3,9.1 | 13.85,9.1 14.27,9.22 v14.3,9.1 | 8.14,9.1 7.76,9.31 | 7.76,9.31 | v7.7,9.2 7.76,9.31 | 8.14,9.1 7.71,9.08 v7.7,9.2 | 7.38,9.52 7.59,9.14 v7.7,9.2 | 7.38,9.52 7.76,9.31 | v7.7,9.2 7.76,9.31 | 4.7,12.65 4.82,13.06 v4.7,13.1 | 4.7,12.65 4.58,13.06 v4.7,13.1
  Bottom 0.254: LED_8.2 52.5,8.91 52.5,11.05 | 52.5,11.05 v52.5,11.5 | LED_7.2 46,8.91 46,9.55 | 46,9.55 v46,10 | LED_6.2 39.9,9.31 39.9,9.75 | 39.9,9.75 v39.9,10.2 | 26.5,8.49 LED_4.2 | LED_5.2 32.79,9.24 33.93,10.38 | 33.93,10.38 v34.25,10.7 | v24,8.65 24.1,8.55 24.44,8.55 | 24.44,8.55 24.95,8.55 25.1,8.7 25.3,8.7 | LED_4.2 | LED_1.2 7.25,9.16 | 7.25,9.16 7.29,9.2 v7.7,9.2 | LED_3.2 19.39,9.1 19.05,9.1 | 19.05,9.1 v18.6,9.1 | LED_2.2 13.69,9.1 13.85,9.1 | 13.85,9.1 v14.3,9.1 | 25.3,8.7 | 25.3,8.7 LED_4.2 | 52.5,11.05 52.68,11.41 v52.5,11.5 | 52.5,11.05 52.32,11.41 v52.5,11.5 | 46,9.55 46.18,9.91 v46,10 | 46,9.55 45.82,9.91 v46,10 | 39.9,9.75 40.08,10.11 v39.9,10.2 | 39.9,9.75 39.72,10.11 v39.9,10.2 | 24.44,8.55 24.13,8.8 v24,8.65 | 24.44,8.55 24.05,8.46 v24,8.65 | 19.05,9.1 18.69,9.28 v18.6,9.1 | 19.05,9.1 18.69,8.92 v18.6,9.1 | 13.85,9.1 14.21,8.92 v14.3,9.1 | 13.85,9.1 14.21,9.28 v14.3,9.1 | 7.25,9.16 7.63,9.01 v7.7,9.2 | 7.25,9.16 7.59,9.37 v7.7,9.2 | 33.93,10.38 34.31,10.51 v34.25,10.7 | 33.93,10.38 34.06,10.76 v34.25,10.7
  Bottom 0.406: v4.7,26.3 4.7,25.85 | 4.7,25.85 4.7,17.5 4.5,17.3 4.5,14.6 4.7,14.4 4.7,13.55 | 4.7,13.55 v4.7,13.1 | 4.7,25.85 4.82,26.27 v4.7,26.3 | 4.7,25.85 4.58,26.27 v4.7,26.3 | 4.7,13.55 4.58,13.13 v4.7,13.1 | 4.7,13.55 4.82,13.13 v4.7,13.1
1ROW1  (via drill 0.3)
  Top 0.406: U10.3 8.6,28.65 9.03,28.22 | 9.03,28.22 v9.35,27.9 | R3.2 10.1,24.5 9.72,24.12 | 9.72,24.12 v9.4,23.8 | 9.03,28.22 9.24,27.84 v9.35,27.9 | 9.03,28.22 9.41,28.01 v9.35,27.9 | 9.72,24.12 9.34,23.91 v9.4,23.8 | 9.72,24.12 9.51,23.74 v9.4,23.8
  Route 0.406: v51.1,16.5 50.65,16.5 | 50.65,16.5 46.45,16.5 | 46.45,16.5 v46,16.5 | v46,16.5 45.55,16.5 | 45.55,16.5 39.95,16.5 | 39.95,16.5 v39.5,16.5 | v39.5,16.5 39.05,16.5 | 39.05,16.5 34.15,16.5 | 34.15,16.5 v33.7,16.5 | v33.7,16.5 33.38,16.18 | 33.38,16.18 32.8,15.6 27.15,15.6 | 27.15,15.6 v26.7,15.6 | 26.6,15.6 v26.7,15.6 | v26.7,15.6 26.38,15.92 | 26.38,15.92 26.2,16.1 23.5,16.1 22.9,16.7 18.95,16.7 | v18.5,16.7 18.18,16.38 | 18.18,16.38 18,16.2 18,15.4 17.5,14.9 16.7,14.9 16.55,14.75 14.15,14.75 13.07,15.83 | 13.07,15.83 v12.75,16.15 | v12.75,16.15 12.43,16.47 | 12.43,16.47 11.9,17 10.25,17 | 10.25,17 v9.8,17 | v9.8,17 9.35,17 | 9.35,17 8.35,17 | 8.35,17 v7.9,17 | 18.95,16.7 v18.5,16.7 | 50.65,16.5 51.06,16.38 v51.1,16.5 | 50.65,16.5 51.06,16.62 v51.1,16.5 | 46.45,16.5 46.03,16.62 v46,16.5 | 46.45,16.5 46.03,16.38 v46,16.5 | 45.55,16.5 45.97,16.38 v46,16.5 | 45.55,16.5 45.97,16.62 v46,16.5 | 39.95,16.5 39.53,16.62 v39.5,16.5 | 39.95,16.5 39.53,16.38 v39.5,16.5 | 39.05,16.5 39.47,16.38 v39.5,16.5 | 39.05,16.5 39.47,16.62 v39.5,16.5 | 34.15,16.5 33.73,16.62 v33.7,16.5 | 34.15,16.5 33.73,16.38 v33.7,16.5 | 33.38,16.18 33.76,16.39 v33.7,16.5 | 33.38,16.18 33.59,16.56 v33.7,16.5 | 27.15,15.6 26.73,15.72 v26.7,15.6 | 27.15,15.6 26.73,15.48 v26.7,15.6 | 26.38,15.92 26.59,15.54 v26.7,15.6 | 26.38,15.92 26.76,15.71 v26.7,15.6 | 18.18,16.38 18.56,16.59 v18.5,16.7 | 18.18,16.38 18.39,16.76 v18.5,16.7 | 18.95,16.7 18.54,16.82 v18.5,16.7 | 18.95,16.7 18.54,16.58 v18.5,16.7 | 13.07,15.83 12.86,16.21 v12.75,16.15 | 13.07,15.83 12.69,16.04 v12.75,16.15 | 12.43,16.47 12.64,16.09 v12.75,16.15 | 12.43,16.47 12.81,16.26 v12.75,16.15 | 8.35,17 7.93,17.12 v7.9,17
  Route 0.406: 8.35,17 7.93,16.88 v7.9,17 | 10.25,17 9.84,17.12 v9.8,17 | 10.25,17 9.84,16.88 v9.8,17 | 9.35,17 9.77,16.88 v9.8,17 | 9.35,17 9.77,17.12 v9.8,17
  Bottom 0.254: LED_15.2 46,15.41 46,16.05 | 46,16.05 v46,16.5 | LED_14.2 39.5,15.41 39.5,16.05 | 39.5,16.05 v39.5,16.5 | LED_13.2 33.64,16.05 | 33.64,16.05 33.7,16.11 v33.7,16.5 | v51.1,16.5 51.1,16.39 51.36,16.13 | 51.36,16.13 LED_16.2 | v7.9,17 7.58,16.68 | 7.58,16.68 7.2,16.3 7.2,15.61 LED_9.2 | LED_10.2 12.79,15.7 | 12.79,15.7 12.75,15.74 v12.75,16.15 | LED_12.2 26.38,15.28 | 26.38,15.28 v26.7,15.6 | LED_11.2 19.79,16.01 19.1,16.7 18.95,16.7 | 18.95,16.7 v18.5,16.7 | 51.36,16.13 51.3,16.53 v51.1,16.5 | 51.36,16.13 51,16.32 v51.1,16.5 | 46,16.05 46.18,16.41 v46,16.5 | 46,16.05 45.82,16.41 v46,16.5 | 39.5,16.05 39.68,16.41 v39.5,16.5 | 39.5,16.05 39.32,16.41 v39.5,16.5 | 33.64,16.05 33.87,16.39 v33.7,16.5 | 33.64,16.05 33.51,16.43 v33.7,16.5 | 26.38,15.28 26.76,15.41 v26.7,15.6 | 26.38,15.28 26.51,15.66 v26.7,15.6 | 18.95,16.7 18.59,16.88 v18.5,16.7 | 18.95,16.7 18.59,16.52 v18.5,16.7 | 12.79,15.7 12.94,16.08 v12.75,16.15 | 12.79,15.7 12.58,16.05 v12.75,16.15 | 7.58,16.68 7.96,16.81 v7.9,17 | 7.58,16.68 7.71,17.06 v7.9,17
  Bottom 0.406: v9.35,27.9 9.67,27.58 | 9.67,27.58 9.8,27.45 9.8,24.2 9.72,24.12 | v9.4,23.8 9.1,23.5 9.1,23.46 | 9.1,23.46 9.1,21 9.8,20.3 9.8,17.45 | 9.8,17.45 v9.8,17 | v9.4,23.8 9.72,24.12 | 9.67,27.58 9.46,27.96 v9.35,27.9 | 9.67,27.58 9.29,27.79 v9.35,27.9 | 9.8,17.45 9.68,17.04 v9.8,17 | 9.8,17.45 9.92,17.04 v9.8,17 | 9.1,23.46 9.47,23.69 v9.4,23.8 | 9.1,23.46 9.29,23.85 v9.4,23.8 | 9.72,24.12 9.34,23.91 v9.4,23.8 | 9.72,24.12 9.51,23.74 v9.4,23.8
1ROW2  (via drill 0.3)
  Top 0.406: U9.6 5.75,30.15 5.4,29.8 5.15,29.8 | 5.15,29.8 v4.7,29.8 | R4.2 20,25.3 20.2,25.1 20.2,24.85 | 20.2,24.85 v20.2,24.4 | 20.2,24.85 20.08,24.43 v20.2,24.4 | 20.2,24.85 20.32,24.43 v20.2,24.4 | 5.15,29.8 4.74,29.92 v4.7,29.8 | 5.15,29.8 4.74,29.68 v4.7,29.8
  Route 0.406: v52.2,19.6 52.2,20.05 | 52.2,20.05 52.2,20.7 47.8,25.1 45.75,25.1 | 45.75,25.1 v45.3,25.1 | v45.3,25.1 44.85,25.1 | 44.85,25.1 39.45,25.1 | 39.45,25.1 v39,25.1 | v39,25.1 38.55,25.1 | 38.55,25.1 37.8,25.1 37.7,25.2 37,25.2 36.9,25.1 32.85,25.1 | 32.85,25.1 v32.4,25.1 | v32.4,25.1 31.95,25.1 | 31.95,25.1 26.45,25.1 | 26.45,25.1 v26,25.1 | v26,25.1 25.68,24.78 | 25.68,24.78 25.3,24.4 20.65,24.4 | 20.65,24.4 v20.2,24.4 | v20.2,24.4 19.88,24.72 | 19.88,24.72 19.5,25.1 13.8,25.1 | v13.8,24.35 13.8,24.8 | 13.8,24.8 13.8,25.1 | 13.8,25.1 13.5,25.4 12.2,25.4 11.9,25.1 7,25.1 | v7,24.3 7,24.75 | 7,24.75 7,25.1 | 7,25.1 4.35,27.75 4.35,29.45 4.38,29.48 | 4.38,29.48 v4.7,29.8 | 52.2,20.05 52.08,19.64 v52.2,19.6 | 52.2,20.05 52.32,19.64 v52.2,19.6 | 45.75,25.1 45.34,25.22 v45.3,25.1 | 45.75,25.1 45.34,24.98 v45.3,25.1 | 44.85,25.1 45.27,24.98 v45.3,25.1 | 44.85,25.1 45.27,25.22 v45.3,25.1 | 39.45,25.1 39.03,25.22 v39,25.1 | 39.45,25.1 39.03,24.98 v39,25.1 | 38.55,25.1 38.97,24.98 v39,25.1 | 38.55,25.1 38.97,25.22 v39,25.1 | 32.85,25.1 32.44,25.22 v32.4,25.1 | 32.85,25.1 32.44,24.98 v32.4,25.1 | 31.95,25.1 32.37,24.98 v32.4,25.1 | 31.95,25.1 32.37,25.22 v32.4,25.1 | 26.45,25.1 26.04,25.22 v26,25.1 | 26.45,25.1 26.04,24.98 v26,25.1 | 25.68,24.78 26.06,24.99 v26,25.1 | 25.68,24.78 25.89,25.16 v26,25.1 | 20.65,24.4 20.23,24.52 v20.2,24.4 | 20.65,24.4 20.23,24.28 v20.2,24.4 | 19.88,24.72 20.09,24.34 v20.2,24.4 | 19.88,24.72 20.26,24.51 v20.2,24.4 | 13.8,24.8 13.68,24.39 v13.8,24.35 | 13.8,24.8 13.92,24.39 v13.8,24.35 | 7,24.75 6.88,24.34 v7,24.3 | 7,24.75 7.12,24.34 v7,24.3 | 4.38,29.48 4.76,29.69 v4.7,29.8 | 4.38,29.48 4.59,29.86 v4.7,29.8
  Bottom 0.254: LED_24.2 52.5,21.91 52.5,20.4 52.2,20.1 52.2,20.05 | 52.2,20.05 v52.2,19.6 | 26,24.65 26,22.01 26.29,21.72 LED_20.2 | 26,24.65 v26,25.1 | LED_19.2 20.2,22.11 20.2,23.95 | 20.2,23.95 v20.2,24.4 | LED_17.2 7,21.91 7,23.85 | 7,23.85 v7,24.3 | LED_18.2 13.8,22.21 13.8,23.9 | 13.8,23.9 v13.8,24.35 | LED_22.2 39,21.99 39,24.65 | 39,24.65 v39,25.1 | LED_21.2 32.4,22.09 32.4,24.65 | 32.4,24.65 v32.4,25.1 | LED_23.2 45.3,22.19 45.3,24.65 | 45.3,24.65 v45.3,25.1 | 52.2,20.05 52.02,19.69 v52.2,19.6 | 52.2,20.05 52.38,19.69 v52.2,19.6 | 45.3,24.65 45.48,25.01 v45.3,25.1 | 45.3,24.65 45.12,25.01 v45.3,25.1 | 39,24.65 39.18,25.01 v39,25.1 | 39,24.65 38.82,25.01 v39,25.1 | 32.4,24.65 32.58,25.01 v32.4,25.1 | 32.4,24.65 32.22,25.01 v32.4,25.1 | 26,24.65 26.18,25.01 v26,25.1 | 26,24.65 25.82,25.01 v26,25.1 | 20.2,23.95 20.38,24.31 v20.2,24.4 | 20.2,23.95 20.02,24.31 v20.2,24.4 | 13.8,23.9 13.98,24.26 v13.8,24.35 | 13.8,23.9 13.62,24.26 v13.8,24.35 | 7,23.85 7.18,24.21 v7,24.3 | 7,23.85 6.82,24.21 v7,24.3
1ROW3  (via drill 0.3)
  Top 0.406: 8.58,31.42 8.55,31.45 U9.3 7.85,32.3 7.25,32.9 R5.2 | 8.58,31.42 v8.9,31.1 | 8.58,31.42 8.79,31.04 v8.9,31.1 | 8.58,31.42 8.96,31.21 v8.9,31.1
  Route 0.406: v52.5,30 52.05,30 | 52.05,30 51,30 50.8,30.2 50.1,30.2 49.9,30 44.73,30 | 44.73,30 44.4,30 | v44.4,29.7 44.4,30 | 44.4,30 44.06,30 | 44.06,30 39.95,30 | 39.95,30 v39.5,30 | v39.5,30 39.05,30 | 39.05,30 33.45,30 | 33.45,30 v33,30 | v33,30 32.55,30 | 32.55,30 26.95,30 | 26.95,30 v26.5,30 | v26.5,30 26.05,30 | 26.05,30 20.45,30 | 20.45,30 v20,30 | v20,30 19.9,30.1 19.56,30.1 | 19.56,30.1 13.44,30.1 | 13.44,30.1 13.4,30.1 v13.1,29.8 | v13.1,29.8 12.65,29.8 | 12.65,29.8 9.45,29.8 8.9,30.35 8.9,30.65 | 8.9,30.65 v8.9,31.1 | 52.05,30 52.47,29.88 v52.5,30 | 52.05,30 52.47,30.12 v52.5,30 | 44.73,30 44.35,29.81 v44.4,29.7 | 44.73,30 44.51,29.63 v44.4,29.7 | 44.06,30 44.29,29.63 v44.4,29.7 | 44.06,30 44.45,29.81 v44.4,29.7 | 39.95,30 39.53,30.12 v39.5,30 | 39.95,30 39.53,29.88 v39.5,30 | 39.05,30 39.47,29.88 v39.5,30 | 39.05,30 39.47,30.12 v39.5,30 | 33.45,30 33.03,30.12 v33,30 | 33.45,30 33.03,29.88 v33,30 | 32.55,30 32.97,29.88 v33,30 | 32.55,30 32.97,30.12 v33,30 | 26.95,30 26.54,30.12 v26.5,30 | 26.95,30 26.54,29.88 v26.5,30 | 26.05,30 26.46,29.88 v26.5,30 | 26.05,30 26.46,30.12 v26.5,30 | 20.45,30 20.04,30.12 v20,30 | 20.45,30 20.04,29.88 v20,30 | 19.56,30.1 19.94,29.89 v20,30 | 19.56,30.1 19.99,30.12 v20,30 | 13.44,30.1 13.05,29.91 v13.1,29.8 | 13.44,30.1 13.21,29.73 v13.1,29.8 | 12.65,29.8 13.06,29.68 v13.1,29.8 | 12.65,29.8 13.06,29.92 v13.1,29.8 | 8.9,30.65 9.02,31.07 v8.9,31.1 | 8.9,30.65 8.78,31.07 v8.9,31.1
  Bottom 0.254: LED_32.2 52.5,28.41 52.5,29.55 | 52.5,29.55 v52.5,30 | LED_30.2 39.5,28.41 39.5,29.55 | 39.5,29.55 v39.5,30 | LED_29.2 33,28.41 33,29.55 | 33,29.55 v33,30 | LED_28.2 26.5,28.41 26.5,29.55 | 26.5,29.55 v26.5,30 | LED_27.2 20,28.41 20,29.55 | 20,29.55 v20,30 | v13.1,29.8 13.1,29.35 | 13.1,29.35 13.1,28.39 LED_26.2 | LED_25.2 8.9,30.31 8.9,30.65 | v8.9,31.1 8.9,30.65 | LED_31.2 44.66,29.33 | 44.66,29.33 44.4,29.59 v44.4,29.7 | 52.5,29.55 52.68,29.91 v52.5,30 | 52.5,29.55 52.32,29.91 v52.5,30 | 44.66,29.33 44.6,29.73 v44.4,29.7 | 44.66,29.33 44.3,29.52 v44.4,29.7 | 39.5,29.55 39.68,29.91 v39.5,30 | 39.5,29.55 39.32,29.91 v39.5,30 | 33,29.55 33.18,29.91 v33,30 | 33,29.55 32.82,29.91 v33,30 | 26.5,29.55 26.68,29.91 v26.5,30 | 26.5,29.55 26.32,29.91 v26.5,30 | 20,29.55 20.18,29.91 v20,30 | 20,29.55 19.82,29.91 v20,30 | 13.1,29.35 13.28,29.71 v13.1,29.8 | 13.1,29.35 12.92,29.71 v13.1,29.8 | 8.9,30.65 9.08,31.01 v8.9,31.1 | 8.9,30.65 8.72,31.01 v8.9,31.1
1ROW4  (via drill 0.3)
  Top 0.406: R13.2 7.46,36.3 | 7.46,36.3 7.5,36.3 v7.8,36.6 | U11.6 8.25,35.75 7.85,36.15 | 7.55,36.35 v7.8,36.6 | 7.85,36.15 7.8,36.2 v7.8,36.6 | 7.46,36.3 7.85,36.49 v7.8,36.6 | 7.46,36.3 7.69,36.67 v7.8,36.6 | 7.85,36.15 7.92,36.58 v7.8,36.6 | 7.85,36.15 7.68,36.55 v7.8,36.6
  Route 0.406: v52.5,36 52.05,36 | 52.05,36 46.95,36 | 46.95,36 v46.5,36 | v46.5,36 46.05,36 | 46.05,36 40.45,36 | 40.45,36 v40,36 | v40,36 39.55,36 | 39.55,36 33.45,36 | 33.45,36 v33,36 | v33,36 32.55,36 | 32.55,36 26.95,36 | 26.95,36 v26.5,36 | v26.5,36 26.05,36 | 26.05,36 20.45,36 | 20.45,36 v20,36 | v20,36 19.55,36 | 19.55,36 13.95,36 | 13.95,36 v13.5,36 | v13.5,36 13.05,36 | 13.05,36 10.6,36 10,36.6 8.25,36.6 | 8.25,36.6 v7.8,36.6 | 52.05,36 52.47,35.88 v52.5,36 | 52.05,36 52.47,36.12 v52.5,36 | 8.25,36.6 7.83,36.72 v7.8,36.6 | 8.25,36.6 7.83,36.48 v7.8,36.6 | 13.95,36 13.54,36.12 v13.5,36 | 13.95,36 13.54,35.88 v13.5,36 | 13.05,36 13.46,35.88 v13.5,36 | 13.05,36 13.46,36.12 v13.5,36 | 20.45,36 20.04,36.12 v20,36 | 20.45,36 20.04,35.88 v20,36 | 19.55,36 19.96,35.88 v20,36 | 19.55,36 19.96,36.12 v20,36 | 26.95,36 26.54,36.12 v26.5,36 | 26.95,36 26.54,35.88 v26.5,36 | 26.05,36 26.46,35.88 v26.5,36 | 26.05,36 26.46,36.12 v26.5,36 | 33.45,36 33.03,36.12 v33,36 | 33.45,36 33.03,35.88 v33,36 | 32.55,36 32.97,35.88 v33,36 | 32.55,36 32.97,36.12 v33,36 | 40.45,36 40.03,36.12 v40,36 | 40.45,36 40.03,35.88 v40,36 | 39.55,36 39.97,35.88 v40,36 | 39.55,36 39.97,36.12 v40,36 | 46.95,36 46.53,36.12 v46.5,36 | 46.95,36 46.53,35.88 v46.5,36 | 46.05,36 46.47,35.88 v46.5,36 | 46.05,36 46.47,36.12 v46.5,36
  Bottom 0.254: LED_40.2 52.5,34.91 52.5,35.55 | 52.5,35.55 v52.5,36 | LED_33.2 7,34.91 7,36 7.4,36.4 | 7.4,36.4 7.6,36.6 v7.8,36.6 | LED_34.2 13.5,34.91 13.5,35.55 | 13.5,35.55 v13.5,36 | LED_35.2 20,34.91 20,35.55 | 20,35.55 v20,36 | LED_36.2 26.5,34.91 26.5,35.55 | 26.5,35.55 v26.5,36 | LED_37.2 33,34.91 33,35.55 | 33,35.55 v33,36 | LED_38.2 40,35.41 40,35.55 | 40,35.55 v40,36 | LED_39.2 46.5,35.41 46.5,35.55 | 46.5,35.55 v46.5,36 | 52.5,35.55 52.68,35.91 v52.5,36 | 52.5,35.55 52.32,35.91 v52.5,36 | 7.4,36.4 7.8,36.4 v7.8,36.6 | 7.4,36.4 7.64,36.72 v7.8,36.6 | 13.5,35.55 13.68,35.91 v13.5,36 | 13.5,35.55 13.32,35.91 v13.5,36 | 20,35.55 20.18,35.91 v20,36 | 20,35.55 19.82,35.91 v20,36 | 26.5,35.55 26.68,35.91 v26.5,36 | 26.5,35.55 26.32,35.91 v26.5,36 | 33,35.55 33.18,35.91 v33,36 | 33,35.55 32.82,35.91 v33,36 | 40,35.55 40.18,35.91 v40,36 | 40,35.55 39.82,35.91 v40,36 | 46.5,35.55 46.68,35.91 v46.5,36 | 46.5,35.55 46.32,35.91 v46.5,36
1ROW5  (via drill 0.3)
  Top 0.406: U11.3 10,33.15 | 10,33.15 10.2,33.15 v10.4,32.95 | R14.2 8.3,39.6 9.7,41 9.7,42.05 | 9.7,42.05 v9.7,42.5 | 10,33.15 10.32,32.86 v10.4,32.95 | 10,33.15 10.42,33.07 v10.4,32.95 | 9.7,42.05 9.82,42.47 v9.7,42.5 | 9.7,42.05 9.58,42.47 v9.7,42.5
  Route 0.406: v52.5,42.5 52.05,42.5 | 52.05,42.5 46.45,42.5 | 46.45,42.5 v46,42.5 | v46,42.5 45.55,42.5 | 45.55,42.5 39.95,42.5 | 39.95,42.5 v39.5,42.5 | v39.5,42.5 39.05,42.5 | 39.05,42.5 33.45,42.5 | 33.45,42.5 v33,42.5 | v33,42.5 32.55,42.5 | 32.55,42.5 26.95,42.5 | 26.95,42.5 v26.5,42.5 | v26.5,42.5 26.05,42.5 | 26.05,42.5 20.45,42.5 | 20.45,42.5 v20,42.5 | v20,42.5 19.55,42.5 | 19.55,42.5 13.95,42.5 | 13.95,42.5 v13.5,42.5 | v13.5,42.5 13.05,42.5 | 13.05,42.5 10.15,42.5 | 10.15,42.5 v9.7,42.5 | v9.7,42.5 9.25,42.5 | 9.25,42.5 7.45,42.5 | 7.45,42.5 v7,42.5 | 52.05,42.5 52.47,42.38 v52.5,42.5 | 52.05,42.5 52.47,42.62 v52.5,42.5 | 7.45,42.5 7.04,42.62 v7,42.5 | 7.45,42.5 7.04,42.38 v7,42.5 | 13.95,42.5 13.54,42.62 v13.5,42.5 | 13.95,42.5 13.54,42.38 v13.5,42.5 | 13.05,42.5 13.46,42.38 v13.5,42.5 | 13.05,42.5 13.46,42.62 v13.5,42.5 | 20.45,42.5 20.04,42.62 v20,42.5 | 20.45,42.5 20.04,42.38 v20,42.5 | 19.55,42.5 19.96,42.38 v20,42.5 | 19.55,42.5 19.96,42.62 v20,42.5 | 26.95,42.5 26.54,42.62 v26.5,42.5 | 26.95,42.5 26.54,42.38 v26.5,42.5 | 26.05,42.5 26.46,42.38 v26.5,42.5 | 26.05,42.5 26.46,42.62 v26.5,42.5 | 33.45,42.5 33.03,42.62 v33,42.5 | 33.45,42.5 33.03,42.38 v33,42.5 | 32.55,42.5 32.97,42.38 v33,42.5 | 32.55,42.5 32.97,42.62 v33,42.5 | 39.95,42.5 39.53,42.62 v39.5,42.5 | 39.95,42.5 39.53,42.38 v39.5,42.5 | 39.05,42.5 39.47,42.38 v39.5,42.5 | 39.05,42.5 39.47,42.62 v39.5,42.5 | 46.45,42.5 46.03,42.62 v46,42.5 | 46.45,42.5 46.03,42.38 v46,42.5 | 45.55,42.5 45.97,42.38 v46,42.5 | 45.55,42.5 45.97,42.62 v46,42.5 | 10.15,42.5 9.73,42.62 v9.7,42.5 | 10.15,42.5 9.73,42.38 v9.7,42.5 | 9.25,42.5 9.66,42.38 v9.7,42.5 | 9.25,42.5 9.66,42.62 v9.7,42.5
  Bottom 0.254: LED_48.2 52.5,41.41 52.5,42.05 | 52.5,42.05 v52.5,42.5 | LED_41.2 7,41.41 7,42.05 | 7,42.05 v7,42.5 | LED_42.2 13.5,41.41 13.5,42.05 | 13.5,42.05 v13.5,42.5 | LED_43.2 20,41.41 20,42.05 | 20,42.05 v20,42.5 | LED_44.2 26.5,41.41 26.5,42.05 | 26.5,42.05 v26.5,42.5 | LED_45.2 33,41.41 33,42.05 | 33,42.05 v33,42.5 | LED_46.2 39.5,41.41 39.5,42.05 | 39.5,42.05 v39.5,42.5 | LED_47.2 46,41.41 46,42.05 | 46,42.05 v46,42.5 | 52.5,42.05 52.68,42.41 v52.5,42.5 | 52.5,42.05 52.32,42.41 v52.5,42.5 | 7,42.05 7.18,42.41 v7,42.5 | 7,42.05 6.82,42.41 v7,42.5 | 13.5,42.05 13.68,42.41 v13.5,42.5 | 13.5,42.05 13.32,42.41 v13.5,42.5 | 20,42.05 20.18,42.41 v20,42.5 | 20,42.05 19.82,42.41 v20,42.5 | 26.5,42.05 26.68,42.41 v26.5,42.5 | 26.5,42.05 26.32,42.41 v26.5,42.5 | 33,42.05 33.18,42.41 v33,42.5 | 33,42.05 32.82,42.41 v33,42.5 | 39.5,42.05 39.68,42.41 v39.5,42.5 | 39.5,42.05 39.32,42.41 v39.5,42.5 | 46,42.05 46.18,42.41 v46,42.5 | 46,42.05 45.82,42.41 v46,42.5
  Bottom 0.406: v10.4,32.95 10.4,33.4 | 10.4,33.4 10.4,36.2 9.6,37 9.6,38.7 9.8,38.9 9.8,39.5 9.7,39.6 9.7,42.05 | 9.7,42.05 v9.7,42.5 | 10.4,33.4 10.28,32.98 v10.4,32.95 | 10.4,33.4 10.52,32.98 v10.4,32.95 | 9.7,42.05 9.82,42.47 v9.7,42.5 | 9.7,42.05 9.58,42.47 v9.7,42.5
1ROW6  (via drill 0.3)
  Top 0.406: R15.2 9.95,37.4 | 9.95,37.4 v10.4,37.4 | U12.6 11.15,36.65 10.72,37.08 | 10.72,37.08 v10.4,37.4 | 9.95,37.4 10.37,37.28 v10.4,37.4 | 9.95,37.4 10.37,37.52 v10.4,37.4 | 10.72,37.08 10.51,37.46 v10.4,37.4 | 10.72,37.08 10.34,37.29 v10.4,37.4
  Route 0.406: v52.5,49 52.05,49 | 52.05,49 46.45,49 | 46.45,49 v46,49 | v46,49 45.55,49 | 45.55,49 39.95,49 | 39.95,49 v39.5,49 | 20.45,49 22.75,49 24.08,47.67 | 20.45,49 v20,49 | v20,49 19.55,49 | 19.55,49 13.95,49 | 13.95,49 v13.5,49 | v13.5,49 13.05,49 | 13.05,49 10.4,49 | 10.4,49 7.45,49 | 7.45,49 v7,49 | v10.4,47.6 10.4,48.05 | 10.4,48.05 10.4,49 | v39.5,49 39.45,48.95 39.05,48.95 | 39.05,48.95 33.35,48.95 | 33.35,48.95 v32.9,48.95 | v32.9,48.95 32.58,48.63 | 32.58,48.63 31.4,47.45 24.84,47.45 | 24.84,47.45 24.5,47.45 v24.4,47.35 | v24.4,47.35 24.08,47.67 | 52.05,49 52.47,48.88 v52.5,49 | 52.05,49 52.47,49.12 v52.5,49 | 46.45,49 46.03,49.12 v46,49 | 46.45,49 46.03,48.88 v46,49 | 45.55,49 45.97,48.88 v46,49 | 45.55,49 45.97,49.12 v46,49 | 39.95,49 39.53,49.12 v39.5,49 | 39.95,49 39.53,48.88 v39.5,49 | 39.05,48.95 39.48,48.88 v39.5,49 | 39.05,48.95 39.45,49.12 v39.5,49 | 33.35,48.95 32.94,49.07 v32.9,48.95 | 33.35,48.95 32.94,48.83 v32.9,48.95 | 32.58,48.63 32.96,48.84 v32.9,48.95 | 32.58,48.63 32.79,49.01 v32.9,48.95 | 24.84,47.45 24.41,47.47 v24.4,47.35 | 24.84,47.45 24.46,47.24 v24.4,47.35 | 24.08,47.67 24.29,47.29 v24.4,47.35 | 24.08,47.67 24.46,47.46 v24.4,47.35 | 20.45,49 20.04,49.12 v20,49 | 20.45,49 20.04,48.88 v20,49 | 19.55,49 19.96,48.88 v20,49 | 19.55,49 19.96,49.12 v20,49 | 13.95,49 13.54,49.12 v13.5,49 | 13.95,49 13.54,48.88 v13.5,49 | 13.05,49 13.46,48.88 v13.5,49 | 13.05,49 13.46,49.12 v13.5,49 | 7.45,49 7.04,49.12 v7,49 | 7.45,49 7.04,48.88 v7,49 | 10.4,48.05 10.28,47.63 v10.4,47.6 | 10.4,48.05 10.52,47.63 v10.4,47.6
  Bottom 0.254: LED_56.2 52.5,47.91 52.5,48.55 | 52.5,48.55 v52.5,49 | LED_55.2 46,47.91 46,48.55 | 46,48.55 v46,49 | LED_54.2 39.5,47.91 39.5,48.55 | 39.5,48.55 v39.5,49 | 32.74,47.76 32.75,47.76 32.79,47.72 LED_53.2 32.3,48.19 32.3,48.35 32.58,48.63 | LED_51.2 20,47.91 20,48.55 | 20,48.55 v20,49 | LED_50.2 13.5,47.91 13.5,48.55 | 13.5,48.55 v13.5,49 | LED_49.2 7,47.91 7,48.55 | 7,48.55 v7,49 | v24.4,47.35 24.72,47.67 | 24.72,47.67 24.75,47.7 LED_52.2 | v32.9,48.95 32.58,48.63 | 52.5,48.55 52.68,48.91 v52.5,49 | 52.5,48.55 52.32,48.91 v52.5,49 | 46,48.55 46.18,48.91 v46,49 | 46,48.55 45.82,48.91 v46,49 | 39.5,48.55 39.68,48.91 v39.5,49 | 39.5,48.55 39.32,48.91 v39.5,49 | 32.58,48.63 32.96,48.76 v32.9,48.95 | 32.58,48.63 32.71,49.01 v32.9,48.95 | 24.72,47.67 24.34,47.54 v24.4,47.35 | 24.72,47.67 24.59,47.29 v24.4,47.35 | 20,48.55 20.18,48.91 v20,49 | 20,48.55 19.82,48.91 v20,49 | 13.5,48.55 13.68,48.91 v13.5,49 | 13.5,48.55 13.32,48.91 v13.5,49 | 7,48.55 7.18,48.91 v7,49 | 7,48.55 6.82,48.91 v7,49
  Bottom 0.406: v10.4,37.4 10.4,37.85 | 10.4,37.85 10.4,38.6 10.5,38.7 10.5,47.16 | 10.5,47.16 10.5,47.5 v10.4,47.6 | 10.4,37.85 10.28,37.44 v10.4,37.4 | 10.4,37.85 10.52,37.44 v10.4,37.4 | 10.5,47.16 10.52,47.59 v10.4,47.6 | 10.5,47.16 10.29,47.54 v10.4,47.6
1ROW7  (via drill 0.3)
  Top 0.406: R16.2 10.8,38.5 | 10.8,38.5 11,38.5 v11.2,38.3 | U12.3 12.45,32.55 | 12.45,32.55 12.45,32.15 v12.5,32.1 | 10.8,38.5 11.12,38.21 v11.2,38.3 | 10.8,38.5 11.22,38.42 v11.2,38.3 | 12.45,32.55 12.38,32.12 v12.5,32.1 | 12.45,32.55 12.62,32.15 v12.5,32.1
  Route 0.406: v53,53 52.55,53 | 52.55,53 46.45,53 | 46.45,53 v46,53 | v46,53 45.55,53 | 45.55,53 42.35,53 | 42.35,53 v41.9,53 | v41.9,53 41.45,53 | 41.45,53 33.3,53 | 33.3,53 27.1,53 | v27.1,55.6 27.1,55.15 | 27.1,55.15 27.1,53 | 27.1,53 17.65,53 | 17.65,53 v17.2,53 | v17.2,53 16.75,53 | 16.75,53 13.95,53 | 13.95,53 v13.5,53 | v13.5,53 13.05,53 | 13.05,53 11.45,53 | 11.45,53 v11,53 | v33.3,55.1 33.3,54.65 | 33.3,54.65 33.3,53 | 52.55,53 52.97,52.88 v53,53 | 52.55,53 52.97,53.12 v53,53 | 46.45,53 46.03,53.12 v46,53 | 46.45,53 46.03,52.88 v46,53 | 45.55,53 45.97,52.88 v46,53 | 45.55,53 45.97,53.12 v46,53 | 42.35,53 41.94,53.12 v41.9,53 | 42.35,53 41.94,52.88 v41.9,53 | 41.45,53 41.87,52.88 v41.9,53 | 41.45,53 41.87,53.12 v41.9,53 | 27.1,55.15 27.22,55.56 v27.1,55.6 | 27.1,55.15 26.98,55.56 v27.1,55.6 | 17.65,53 17.23,53.12 v17.2,53 | 17.65,53 17.23,52.88 v17.2,53 | 16.75,53 17.16,52.88 v17.2,53 | 16.75,53 17.16,53.12 v17.2,53 | 13.95,53 13.54,53.12 v13.5,53 | 13.95,53 13.54,52.88 v13.5,53 | 13.05,53 13.46,52.88 v13.5,53 | 13.05,53 13.46,53.12 v13.5,53 | 11.45,53 11.04,53.12 v11,53 | 11.45,53 11.04,52.88 v11,53 | 33.3,54.65 33.42,55.06 v33.3,55.1 | 33.3,54.65 33.18,55.06 v33.3,55.1
  Bottom 0.254: LED_63.2 46,53.99 46,53.45 | 46,53.45 v46,53 | LED_59.2 18.4,54.2 17.52,53.32 | 17.52,53.32 v17.2,53 | v41.9,53 41.58,53.32 | 41.58,53.32 41.5,53.4 40.09,53.4 LED_62.2 | LED_60.2 27.1,54.99 27.1,55.15 | 27.1,55.15 v27.1,55.6 | LED_61.2 33.24,54.65 | 33.24,54.65 33.3,54.71 v33.3,55.1 | 46,53.45 45.82,53.09 v46,53 | 46,53.45 46.18,53.09 v46,53 | 41.58,53.32 41.71,52.94 v41.9,53 | 41.58,53.32 41.96,53.19 v41.9,53 | 27.1,55.15 27.28,55.51 v27.1,55.6 | 27.1,55.15 26.92,55.51 v27.1,55.6 | 17.52,53.32 17.14,53.19 v17.2,53 | 17.52,53.32 17.39,52.94 v17.2,53 | 33.24,54.65 33.47,54.99 v33.3,55.1 | 33.24,54.65 33.11,55.03 v33.3,55.1
  Bottom 0.406: LED_64.2 53,53.49 53,53.45 | 53,53.45 v53,53 | LED_60.2 | LED_58.2 13.5,53.99 13.5,53.45 | 13.5,53.45 v13.5,53 | v12.5,32.1 12.18,32.42 | 12.18,32.42 11.2,33.4 11.2,37.85 | 11.2,37.85 v11.2,38.3 | v11.2,38.3 11.2,38.75 | 11.2,38.75 11.2,47.4 11.4,47.6 11.4,52.6 11.32,52.68 | 11.32,52.68 v11,53 | LED_57.2 9.8,54.2 10.68,53.32 | 10.68,53.32 v11,53 | 53,53.45 52.88,53.03 v53,53 | 53,53.45 53.12,53.03 v53,53 | 13.5,53.45 13.38,53.03 v13.5,53 | 13.5,53.45 13.62,53.03 v13.5,53 | 11.32,52.68 11.11,53.06 v11,53 | 11.32,52.68 10.94,52.89 v11,53 | 10.68,53.32 10.89,52.94 v11,53 | 10.68,53.32 11.06,53.11 v11,53 | 11.2,37.85 11.32,38.27 v11.2,38.3 | 11.2,37.85 11.08,38.27 v11.2,38.3 | 11.2,38.75 11.08,38.34 v11.2,38.3 | 11.2,38.75 11.32,38.34 v11.2,38.3 | 12.18,32.42 12.39,32.04 v12.5,32.1 | 12.18,32.42 12.56,32.21 v12.5,32.1
+3V3  (via drill 0.3)
  Top 0.203: U8.P$1 26.6,49.23 26.6,49.55
  Top 0.254: C15.1 25.5,50.05 26,49.55 26.6,49.55 27.25,49.55 27.75,49.05 | 27.75,49.05 27.95,48.85 v28.15,48.85 | R27.2 49.45,30.55 49.85,30.95 | 49.85,30.95 49.9,31 v50.3,31 | R28.2 49.5,29.4 50.3,30.2 50.3,30.55 | 50.3,30.55 v50.3,31 | R26.2 36.1,54 | R12.2 33.7,54.2 | R23.2 32.5,53.9 | R18.2 31.3,53.9 | R17.2 30.1,53.9 | 29.83,45.88 29.55,45.6 C14.1 U8.P$8 | 29.83,45.88 v30.15,46.2 | U8.P$8 | 49.85,30.95 50.23,30.81 v50.3,31 | 49.85,30.95 50.19,31.17 v50.3,31 | 50.3,30.55 50.48,30.91 v50.3,31 | 50.3,30.55 50.12,30.91 v50.3,31 | 29.83,45.88 30.21,46.01 v30.15,46.2 | 29.83,45.88 29.96,46.26 v30.15,46.2 | 27.75,49.05 27.99,48.73 v28.15,48.85 | 27.75,49.05 28.15,49.05 v28.15,48.85
  Top 0.406: 37,54.2 v37.19,54.01 v37.2,54
  Top 0.61: U6.3V3 38.24,54 v37.2,54 36.1,54 35.7,54 34.9,54.8 34.3,54.8 33.7,54.2 33.4,53.9 32.5,53.9 31.3,53.9 30.1,53.9 28.6,53.9 | 28.6,53.9 28.4,53.9 C6.1 | U5.5 27.75,54.75 v27.85,54.65 28.6,53.9 | U$10.1 37,54.2
  Top 0.813: v37.19,54.01 38.59,55.64 U$10.1 35.6,55.45 v37.19,54.01
  Route 0.406: v37.2,30.8 37.65,30.8 | 37.65,30.8 49.6,30.8 49.8,31 49.85,31 | 49.85,31 v50.3,31 | 49.85,31 50.27,30.88 v50.3,31 | 49.85,31 50.27,31.12 v50.3,31 | 37.65,30.8 37.23,30.92 v37.2,30.8 | 37.65,30.8 37.23,30.68 v37.2,30.8
  Bottom 0.406: v30.15,46.2 30.15,46.65 | 30.15,46.65 30.15,47.95 29.25,48.85 29.2,48.85 | 29.2,48.85 29.2,49.3 29.6,49.7 29.6,52.9 28.17,54.33 | v28.15,48.85 28.6,48.85 | 28.6,48.85 29.2,48.85 | v37.2,54 37.2,53.55 | 37.2,53.55 37.2,31.25 | 37.2,31.25 v37.2,30.8 | 28.17,54.33 v27.85,54.65 | 37.2,53.55 37.32,53.97 v37.2,54 | 37.2,53.55 37.08,53.97 v37.2,54 | 30.15,46.65 30.03,46.23 v30.15,46.2 | 30.15,46.65 30.27,46.23 v30.15,46.2 | 28.6,48.85 28.18,48.97 v28.15,48.85 | 28.6,48.85 28.18,48.73 v28.15,48.85 | 37.2,31.25 37.08,30.84 v37.2,30.8 | 37.2,31.25 37.32,30.84 v37.2,30.8 | 28.17,54.33 27.96,54.71 v27.85,54.65 | 28.17,54.33 27.79,54.54 v27.85,54.65
+5V  (via drill 0.3)
  Top 0.254: U1.6 27.5,7.44 27.5,7.19
  Top 0.406: U11.4 9.55,34 | U11.1 8.25,34 | U12.1 11.15,34 | 11.15,34 9.55,34 | U12.4 12.45,34 11.15,34 | 9.55,34 8.25,34 | U9.1 7,30.15 7,31.45 U9.4 3.55,31.45 | 3.55,31.45 v3.1,31.45 | 3.55,28.9 5.4,28.9 5.65,28.65 U10.4 7,28.65 7,27.35 U10.1 8.05,27.35 8.75,26.65 U3.16 11.5,26.65 12.1,26.05 C8.1 | 3.55,28.9 v3.1,28.9 | 8.25,34 3.55,34 | 3.55,34 v3.1,34 | C4.1 27.5,7.19 26.95,7.19 | v26.5,7.19 26.95,7.19 | TP7.TP 21.27,54.5 C18.1 | 3.55,31.45 3.13,31.57 v3.1,31.45 | 3.55,31.45 3.13,31.33 v3.1,31.45 | 3.55,28.9 3.13,29.02 v3.1,28.9 | 3.55,28.9 3.13,28.78 v3.1,28.9 | 3.55,34 3.13,34.12 v3.1,34 | 3.55,34 3.13,33.88 v3.1,34 | 26.95,7.19 26.54,7.31 v26.5,7.19 | 26.95,7.19 26.54,7.07 v26.5,7.19
  Top 0.61: 22.9,54.75 U5.1 25.05,54.75 25.5,54.3 25.5,53.3 25.05,52.85 U5.3 | 22.9,54.75 21.6,54.75 | 22.9,54.75 22.8,54.85 v22.8,55.7 | v22,55.7 22,55 22.1,54.9 22,54.8 21.2,54.8 | v21.2,55.7 21.2,54.8 | 21.2,54.8 21.2,54.62 C18.1
  other vias: 4.6,4 5.6,5.9 4.4,4.7 5.2,4.6 5.8,5.2 5,5.3
  pour Top (no thermals): 7.2,8 8.1,7.1 2.9,1.8 1.9,2.8
  pour Route: 24,54.5 24,58.5 3,58.5 1.5,57 1.5,5 3,3.5 11,3.5 13,5.5 23,5.5 24,6.5 27,6.5 27,9 7.5,9 4,12.5 4,55.5 4.5,56 18.5,56 20,54.5
+5V_BLEED
  pour Top (no thermals): 11.5,4.2 11.5,5.5 9.8,5.5 8.8,6.5 3.4,1.2 4,0.6 6,0.6 9.6,4.2
+5V_SWITCH
  pour Top (no thermals): 1.2,3.4 6.6,8.8 5.8,9.6 5.8,12.4 4.2,12.4 4.2,9.5 0.7,6 0.7,3.9
ACC_INT1  (via drill 0.3)
  Top 0.203: U8.P$3 26,48.7 25,48.7 | 25,48.7 24.6,48.7 v24.55,48.75 | 25,48.7 24.68,48.93 v24.55,48.75 | 25,48.7 24.64,48.54 v24.55,48.75
  Top 0.254: U6.IO13 34.8,48.96 34.8,49.35 | 34.8,49.35 v34.8,49.8 | 34.8,49.35 34.98,49.71 v34.8,49.8 | 34.8,49.35 34.62,49.71 v34.8,49.8
  Route 0.254: v24.55,48.75 24.87,48.43 | 24.87,48.43 25.2,48.1 29.4,48.1 31,49.7 34.36,49.7 | 34.36,49.7 34.7,49.7 v34.8,49.8 | 24.87,48.43 24.74,48.81 v24.55,48.75 | 24.87,48.43 24.49,48.56 v24.55,48.75 | 34.36,49.7 34.75,49.6 v34.8,49.8 | 34.36,49.7 34.67,49.95 v34.8,49.8
ARM_3V3  (via drill 0.3)
  Top 0.254: U1.11 32.1,8.24 32.1,7.8 31.4,7.1 | 31.4,7.1 30.3,6 C2.1 29.9,6.6 29.77,6.73 | 25.35,7 26.25,7.9 27.25,7.9 U1.5 | 28.7,7.05 28.55,7.2 28.55,7.78 U1.7 | 28.7,7.05 29,7.05 | 29,7.05 v29.45,7.05 | 29.77,6.73 v29.45,7.05 | C1.1 28.7,7.05 | 25.35,7 v25.35,6.55 | TP9.TP 31.4,7.1 | U1.1 26.73,10.75 C3.1 24.47,10.75 | 24.47,10.75 24.2,10.75 v24.05,10.6 | C5.1 25.9,6 25.67,6.23 | 25.67,6.23 v25.35,6.55 | 29,7.05 29.36,6.87 v29.45,7.05 | 29,7.05 29.36,7.23 v29.45,7.05 | 29.77,6.73 29.64,7.11 v29.45,7.05 | 29.77,6.73 29.39,6.86 v29.45,7.05 | 24.47,10.75 24.07,10.8 v24.05,10.6 | 24.47,10.75 24.19,10.46 v24.05,10.6 | 25.35,7 25.17,6.64 v25.35,6.55 | 25.35,7 25.53,6.64 v25.35,6.55 | 25.67,6.23 25.54,6.61 v25.35,6.55 | 25.67,6.23 25.29,6.36 v25.35,6.55
  Top 0.406: R6.2 C7.1 | U2.24 14.3,16 14.7,15.6 C11.1 14.7,13.1 13.67,12.07 | C7.1 7.6,14.7 7.9,15 7.9,15.05 | 7.9,15.05 v7.9,15.5 | 13.67,12.07 v13.35,11.75 | C7.1 7,15.81 U4.24 | 7.9,15.05 8.02,15.46 v7.9,15.5 | 7.9,15.05 7.78,15.46 v7.9,15.5 | 13.67,12.07 13.29,11.86 v13.35,11.75 | 13.67,12.07 13.46,11.69 v13.35,11.75
  Route 0.406: 29.13,7.37 26.2,10.3 24.39,10.3 | 29.13,7.37 v29.45,7.05 | v6.6,11.85 7.05,11.85 | 7.05,11.85 11.15,11.85 11.25,11.75 12.9,11.75 | 12.9,11.75 v13.35,11.75 | v13.35,11.75 13.8,11.75 | 13.8,11.75 14.95,11.75 15.75,10.95 23.7,10.95 23.73,10.92 | 24.39,10.3 24.35,10.3 v24.05,10.6 | 23.73,10.92 v24.05,10.6 | 29.13,7.37 29.34,6.99 v29.45,7.05 | 29.13,7.37 29.51,7.16 v29.45,7.05 | 24.39,10.3 24.16,10.67 v24.05,10.6 | 24.39,10.3 24,10.49 v24.05,10.6 | 23.73,10.92 23.94,10.54 v24.05,10.6 | 23.73,10.92 24.11,10.71 v24.05,10.6 | 7.05,11.85 6.63,11.97 v6.6,11.85 | 7.05,11.85 6.63,11.73 v6.6,11.85 | 12.9,11.75 13.31,11.63 v13.35,11.75 | 12.9,11.75 13.31,11.87 v13.35,11.75 | 13.8,11.75 13.38,11.87 v13.35,11.75 | 13.8,11.75 13.38,11.63 v13.35,11.75
  Bottom 0.406: v25.35,6.55 25.35,6.5 25.64,6.21 | 25.64,6.21 27.15,4.7 28.75,4.7 29.5,5.45 29.5,6.6 | 29.5,6.6 29.5,7 v29.45,7.05 | v7.9,15.5 7.9,15.05 | 7.9,15.05 7.9,14.9 6.6,13.6 6.6,12.3 | 6.6,12.3 v6.6,11.85 | 29.5,6.6 29.57,7.03 v29.45,7.05 | 29.5,6.6 29.34,7 v29.45,7.05 | 25.64,6.21 25.46,6.6 v25.35,6.55 | 25.64,6.21 25.28,6.45 v25.35,6.55 | 7.9,15.05 8.02,15.46 v7.9,15.5 | 7.9,15.05 7.78,15.46 v7.9,15.5 | 6.6,12.3 6.48,11.88 v6.6,11.85 | 6.6,12.3 6.72,11.88 v6.6,11.85
ARM_BOOTLOADER
  Top 0.254: U1.25 29.1,14.78 29.1,15.6 TP16.TP